# Altium PCB Coin.PcbDoc (part 1 of 2)
Units mm, origin at the board's own origin, x right, y up, seen from the top; angles counter-clockwise.
Board outline 39.43 x 39.88 mm, 4 copper layers (Top Layer, Layer 1, Layer 2, Bottom Layer), stack 1.008 mm thick; 78 components, 48 nets, 291 pads, 74 vias.
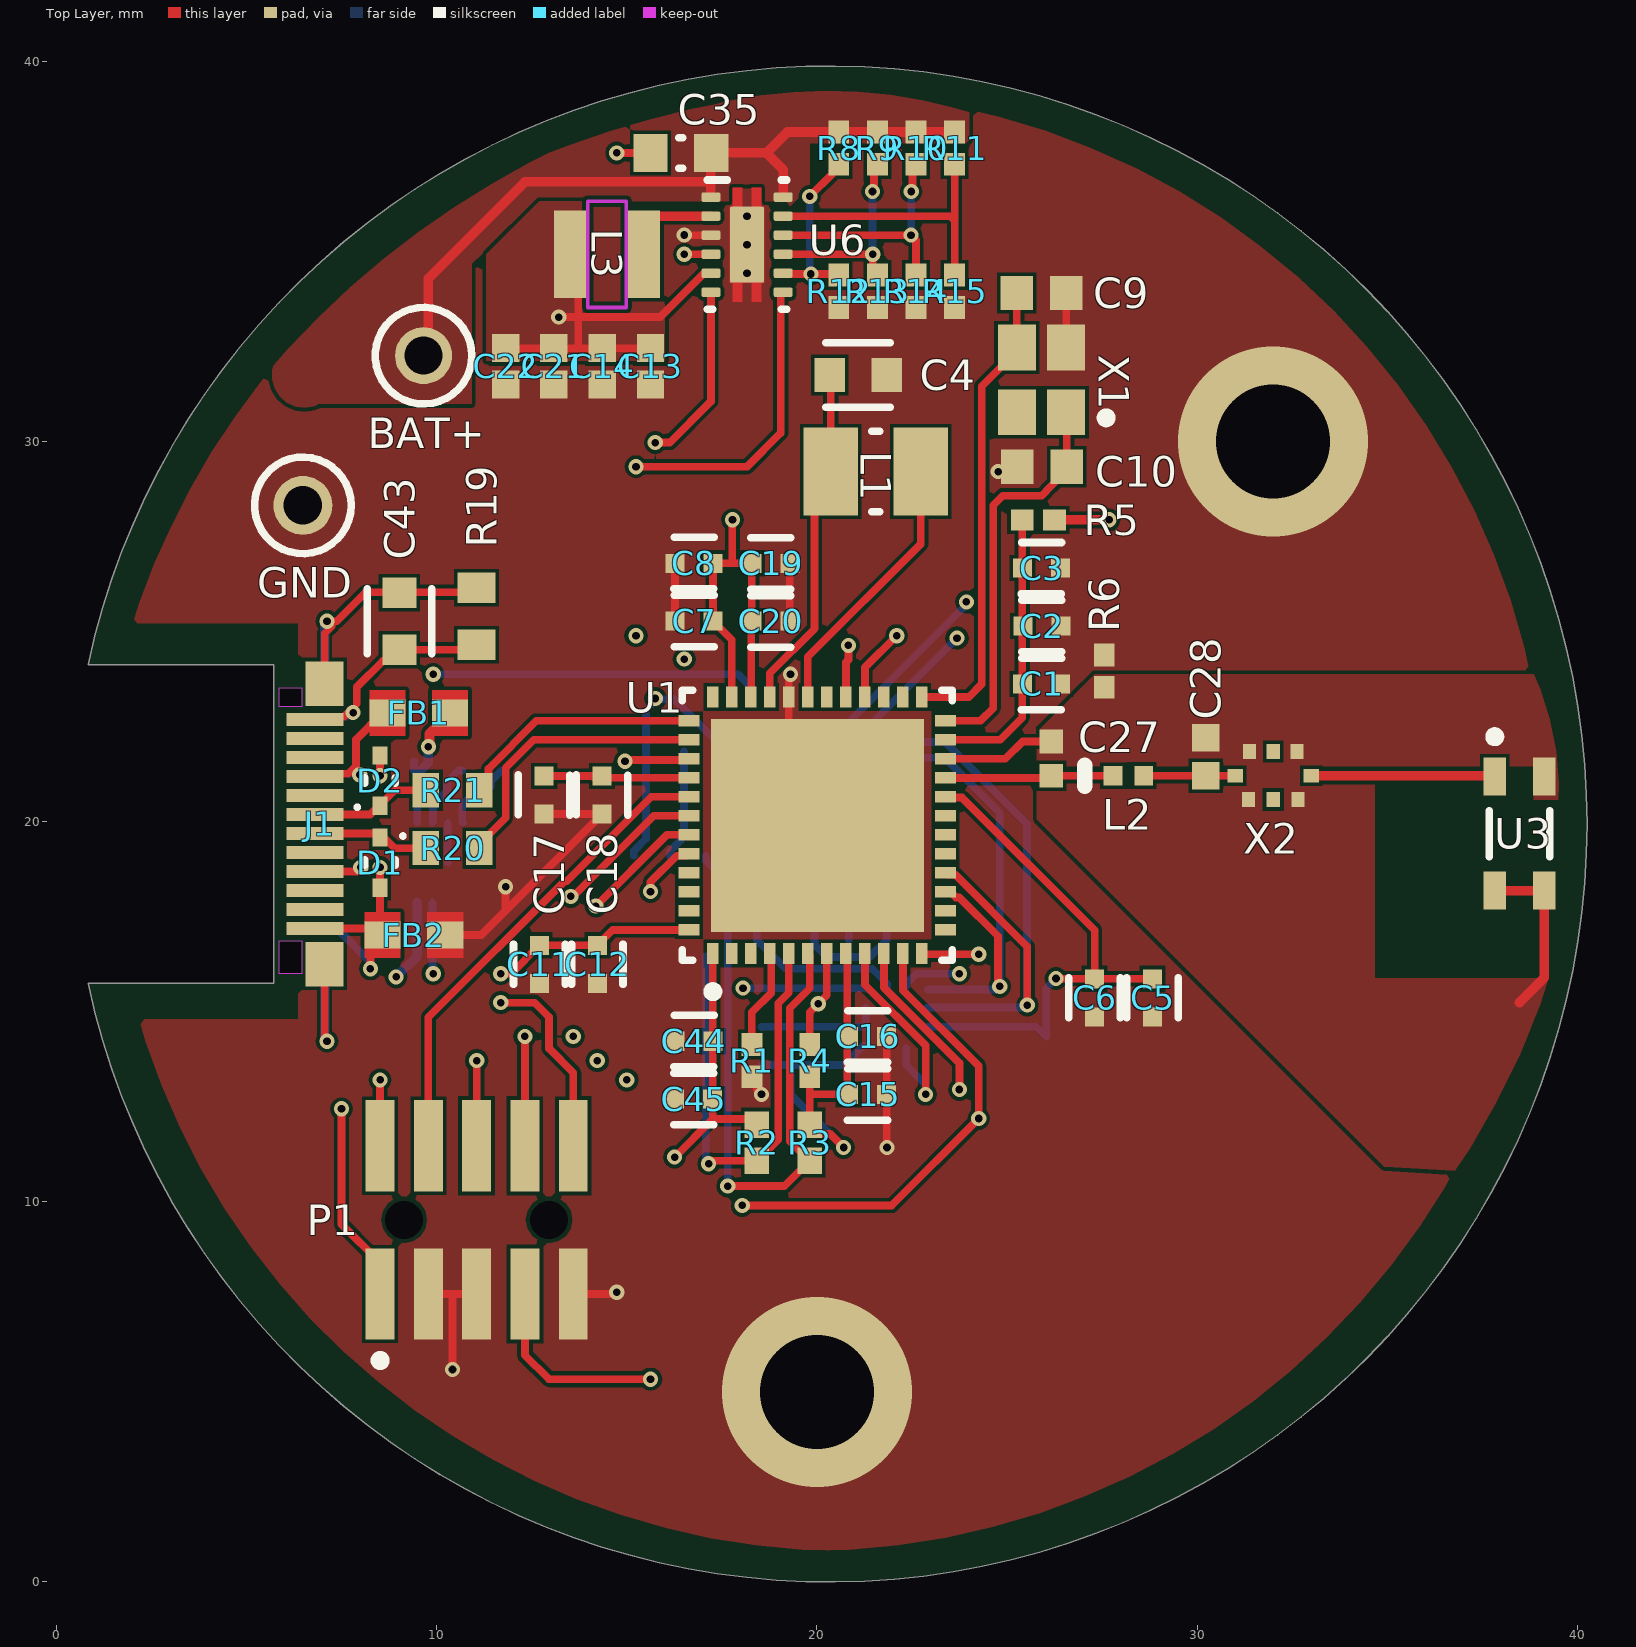
[diagram p0: Top Layer view]
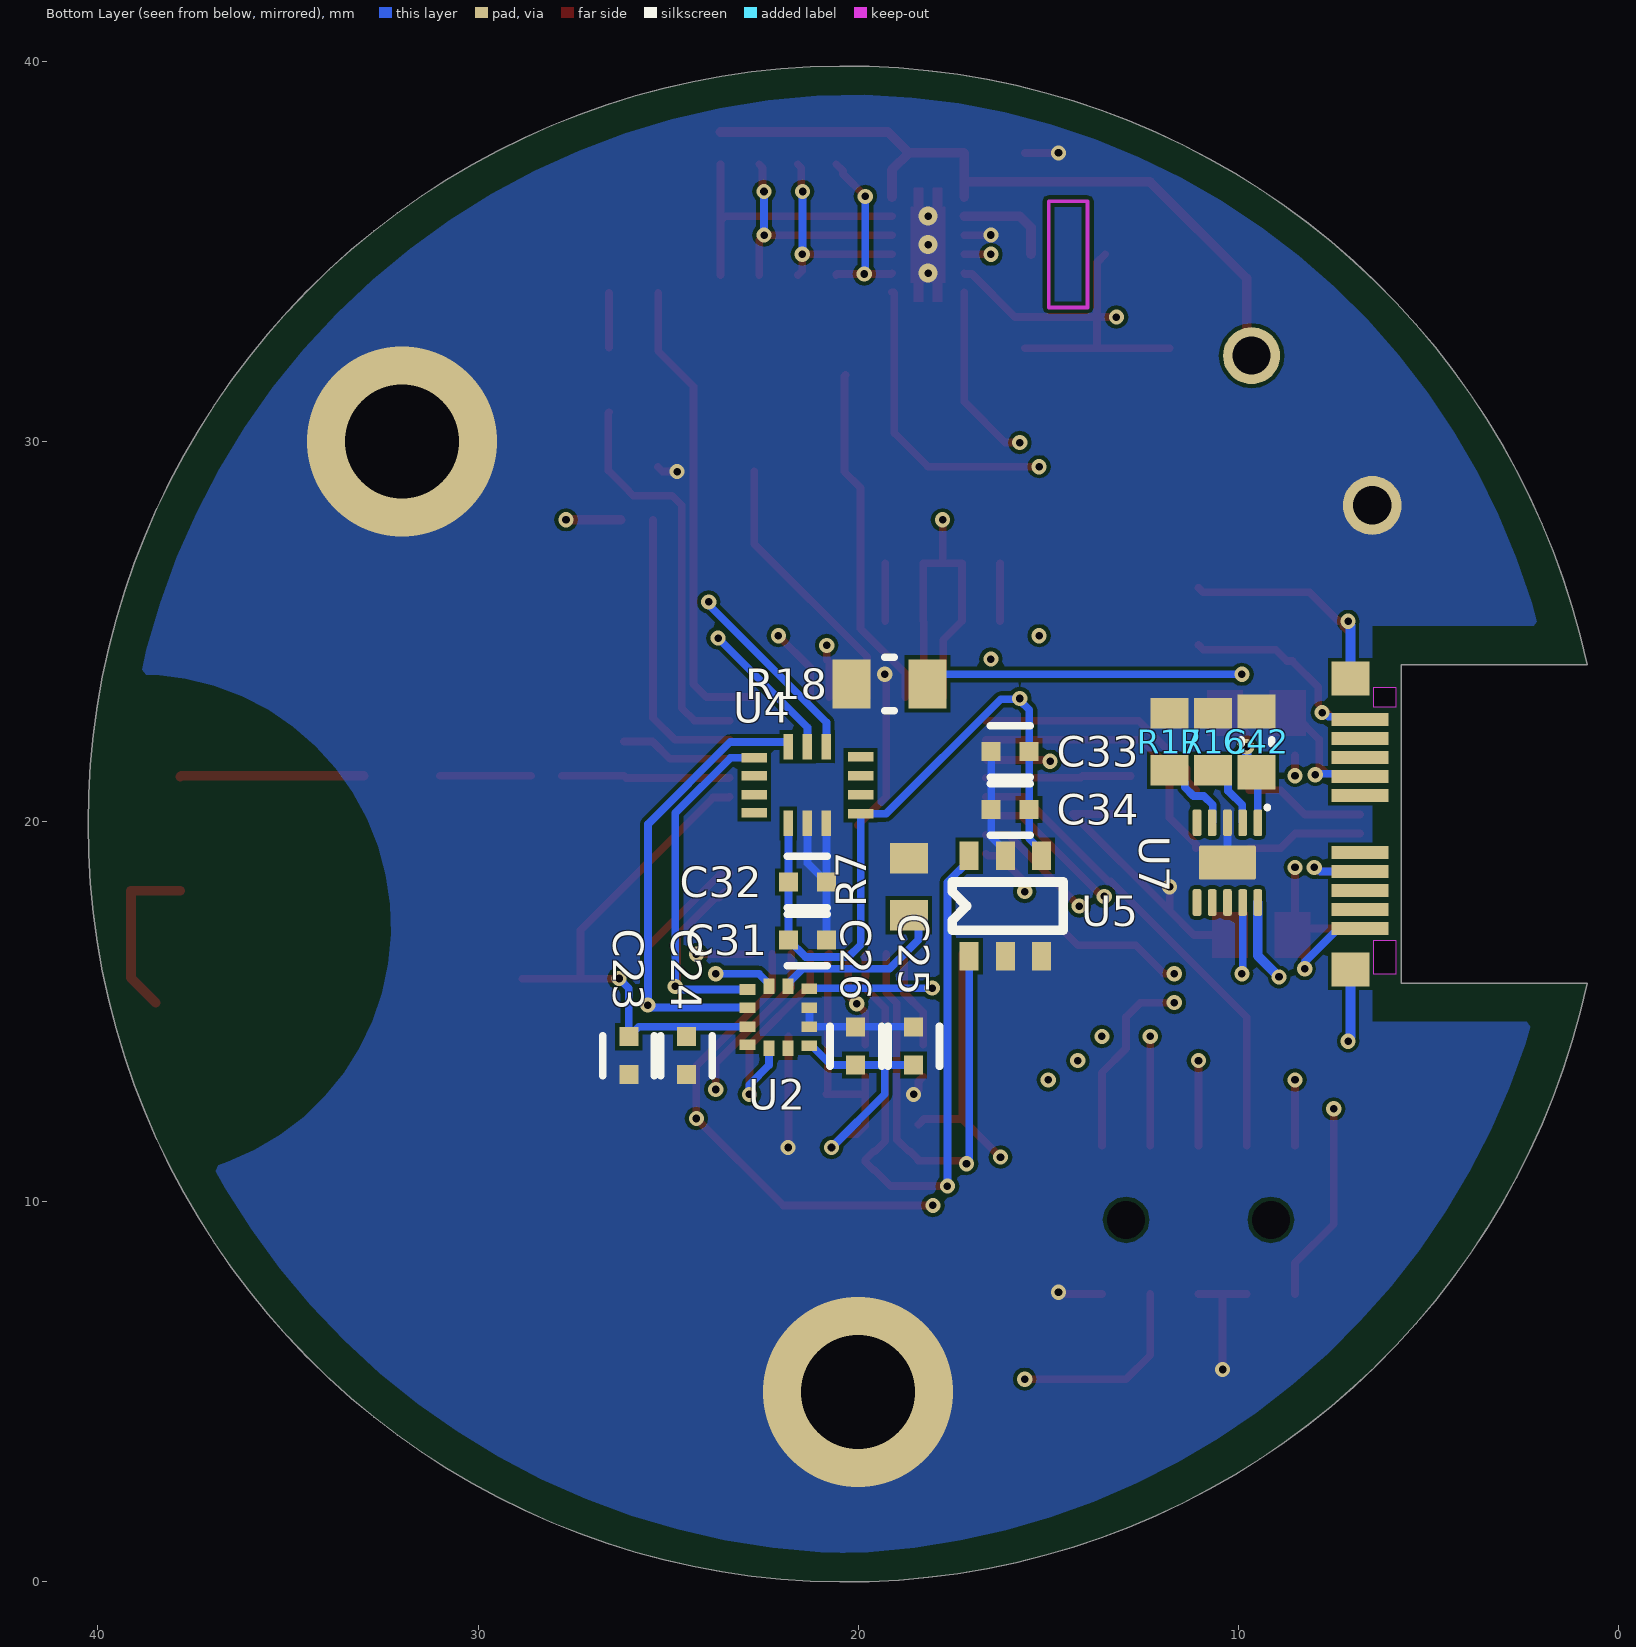
[diagram p1: Bottom Layer view, seen from below]
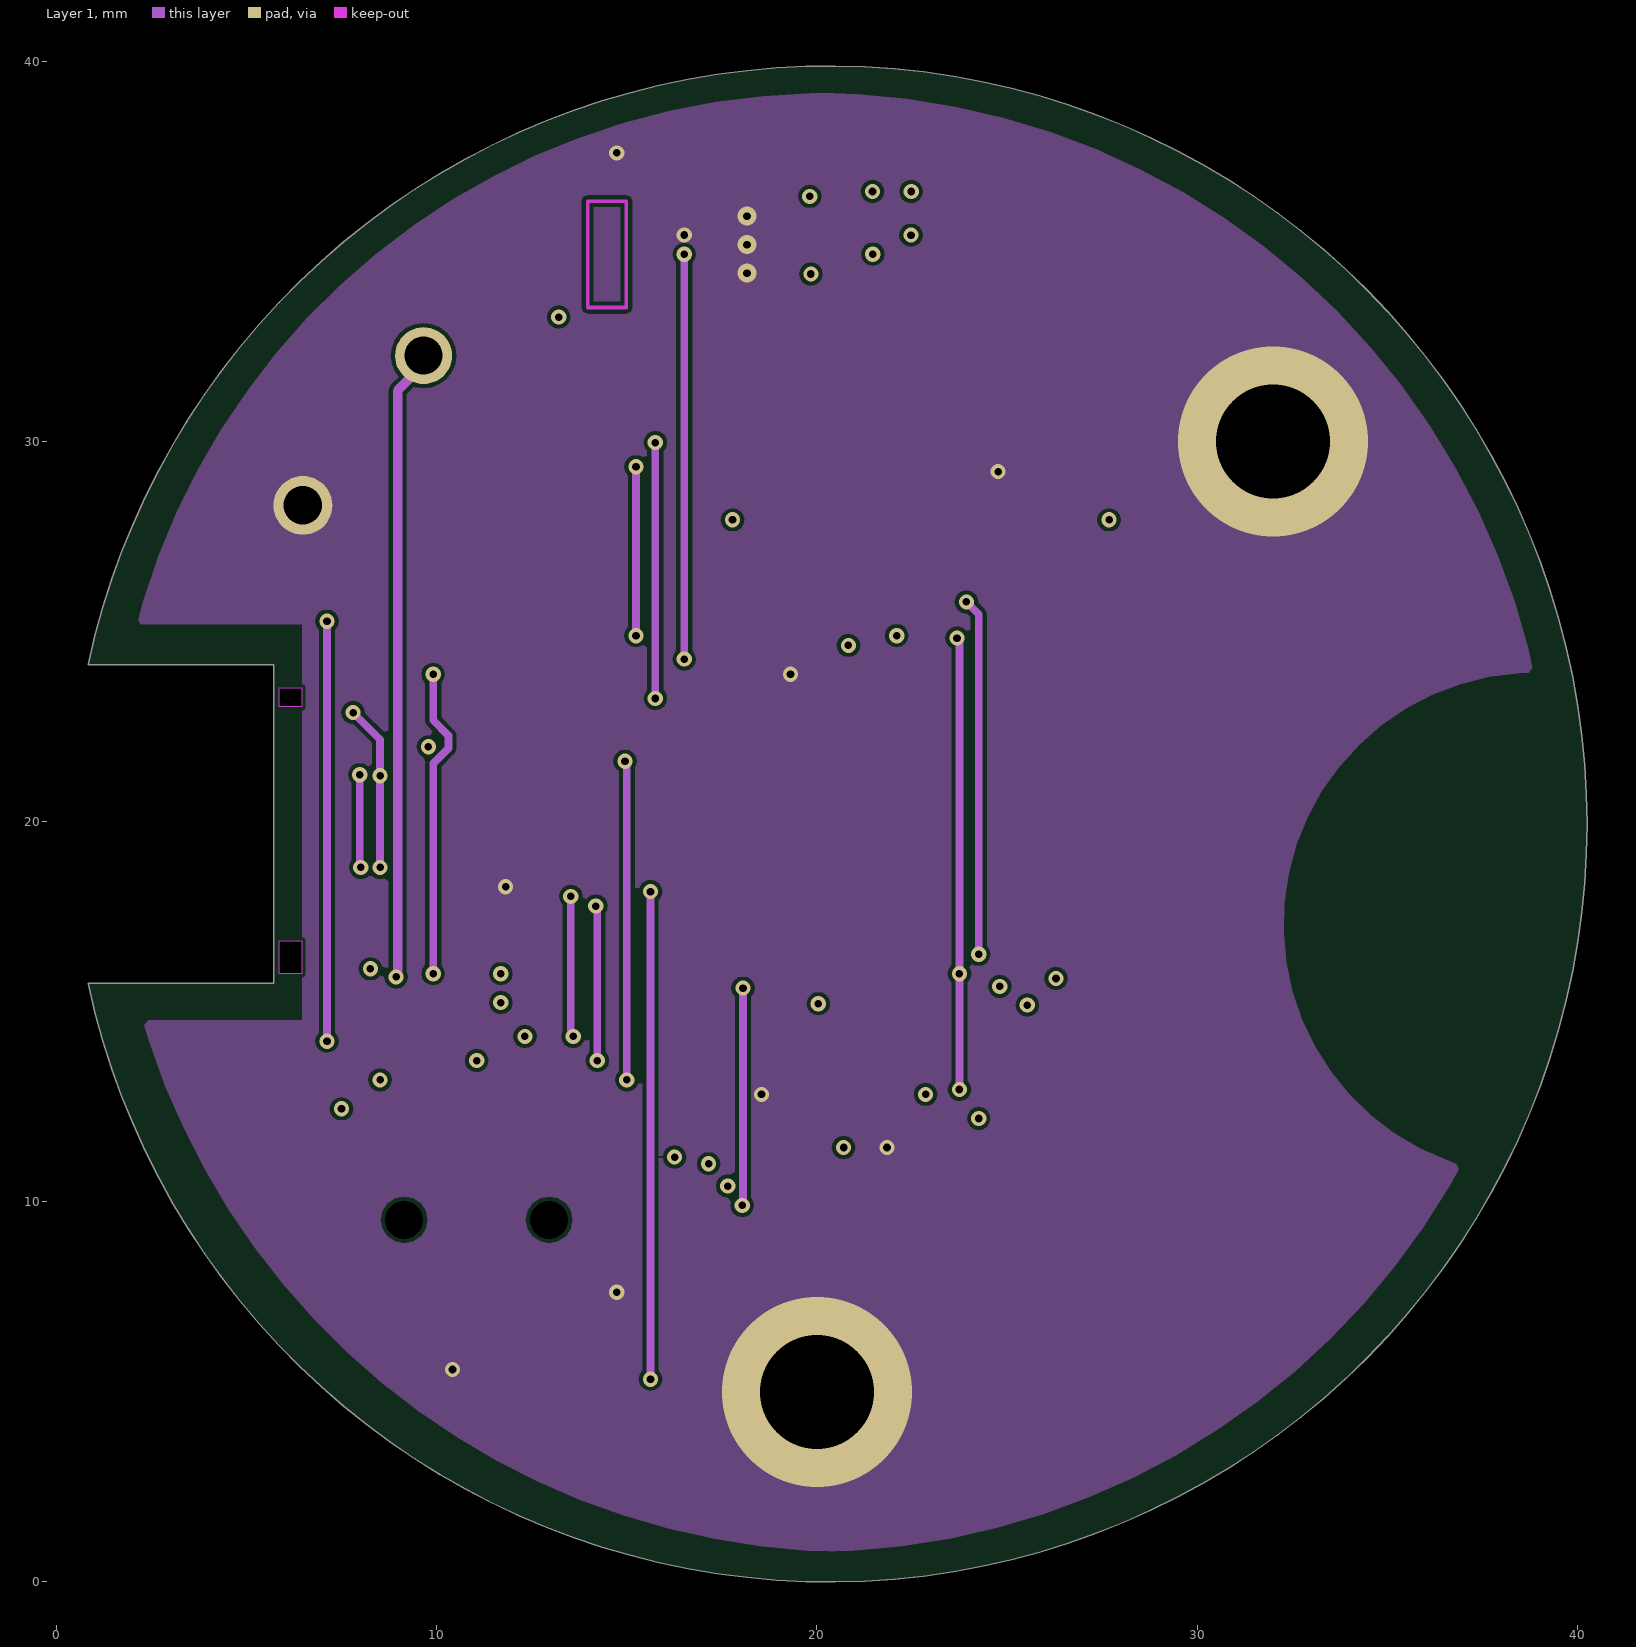
[diagram p2: Layer 1]
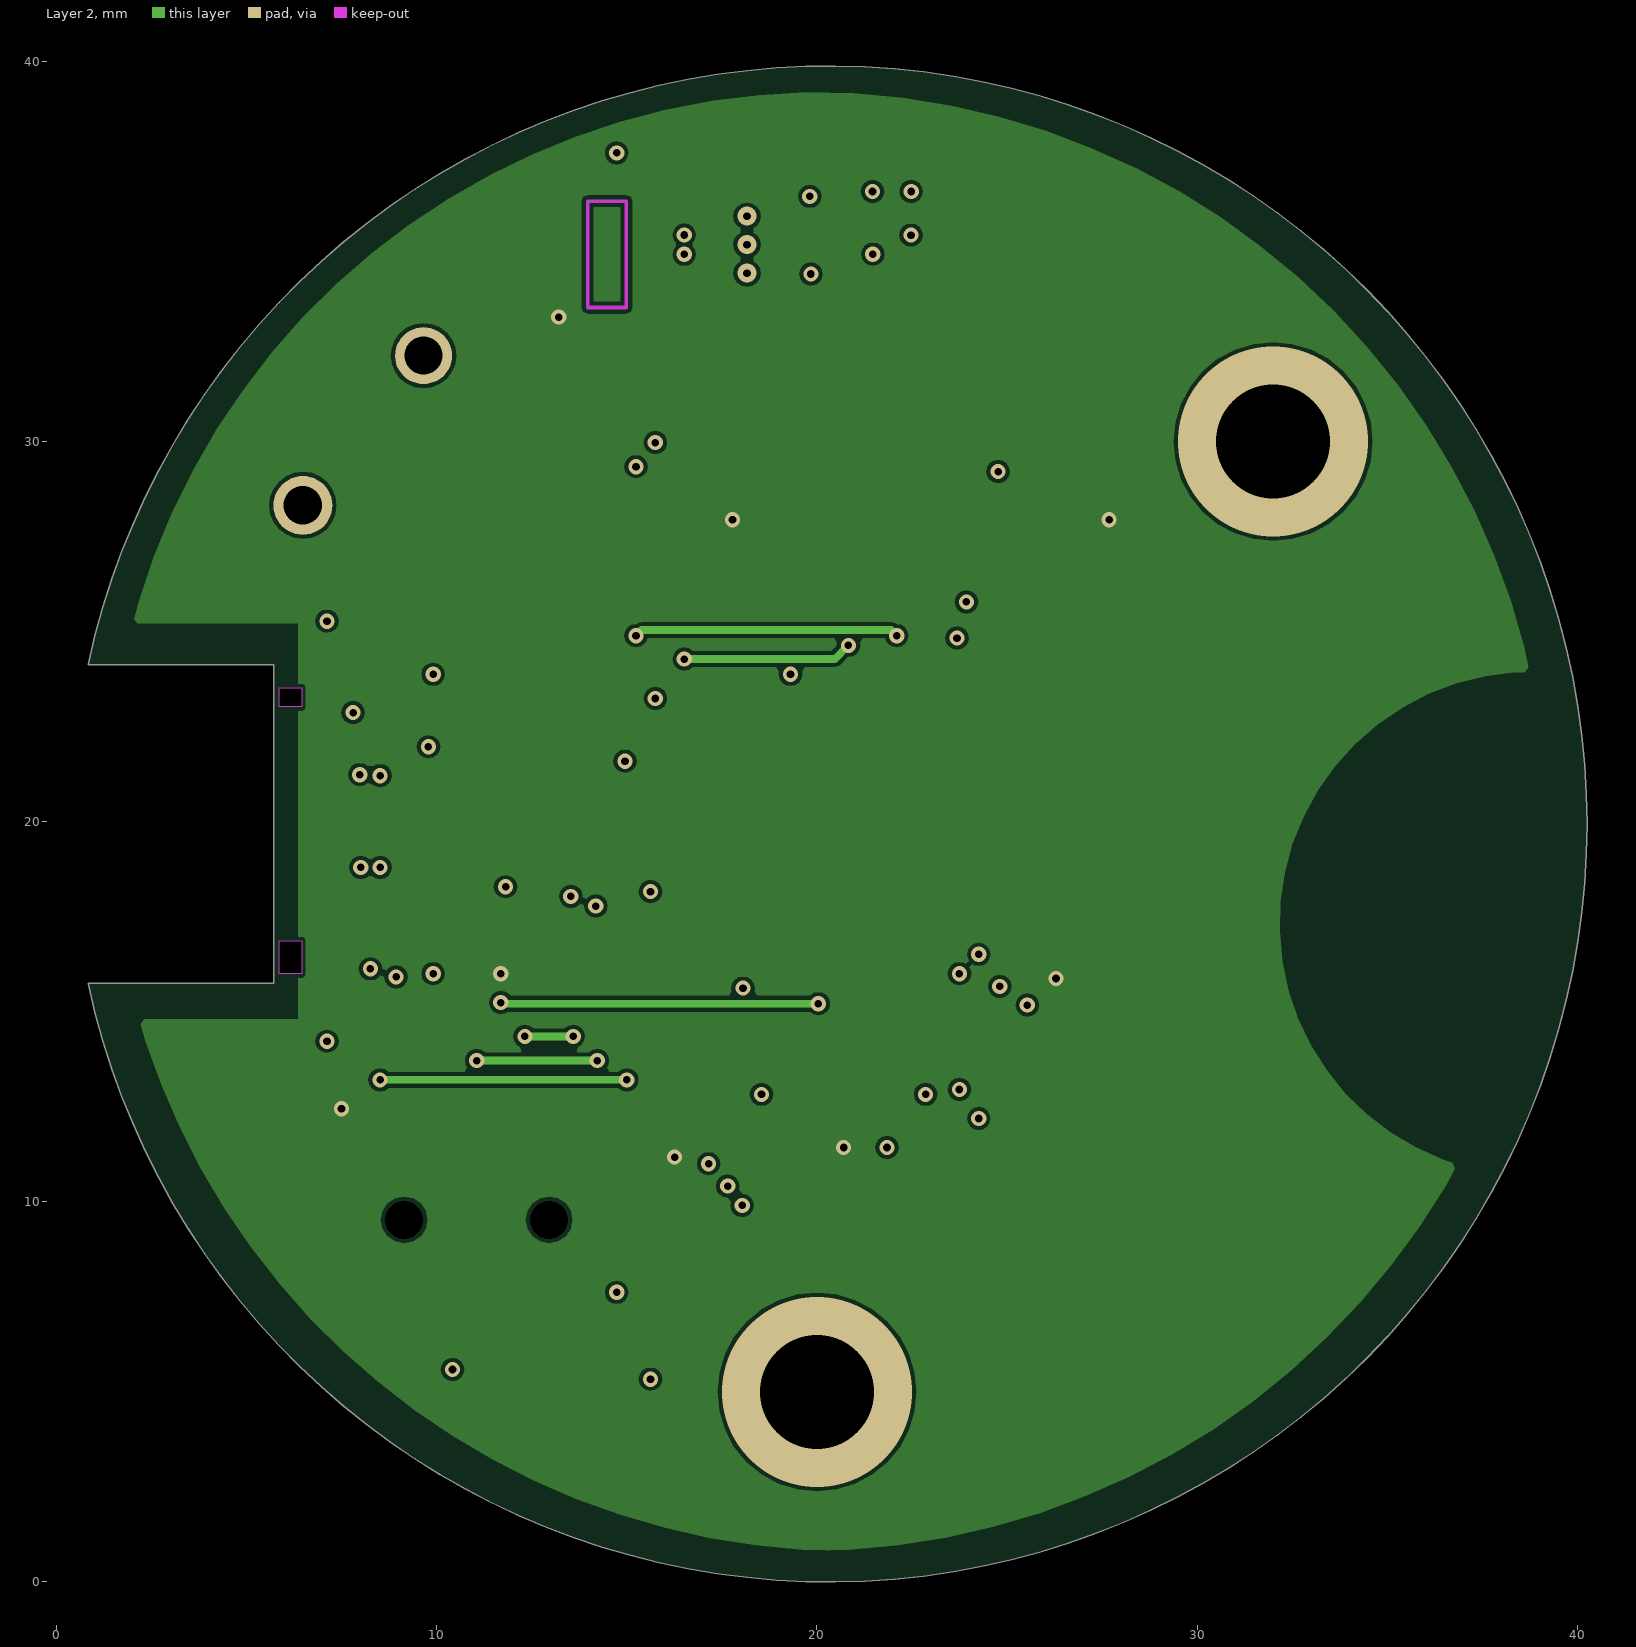
[diagram p3: Layer 2]
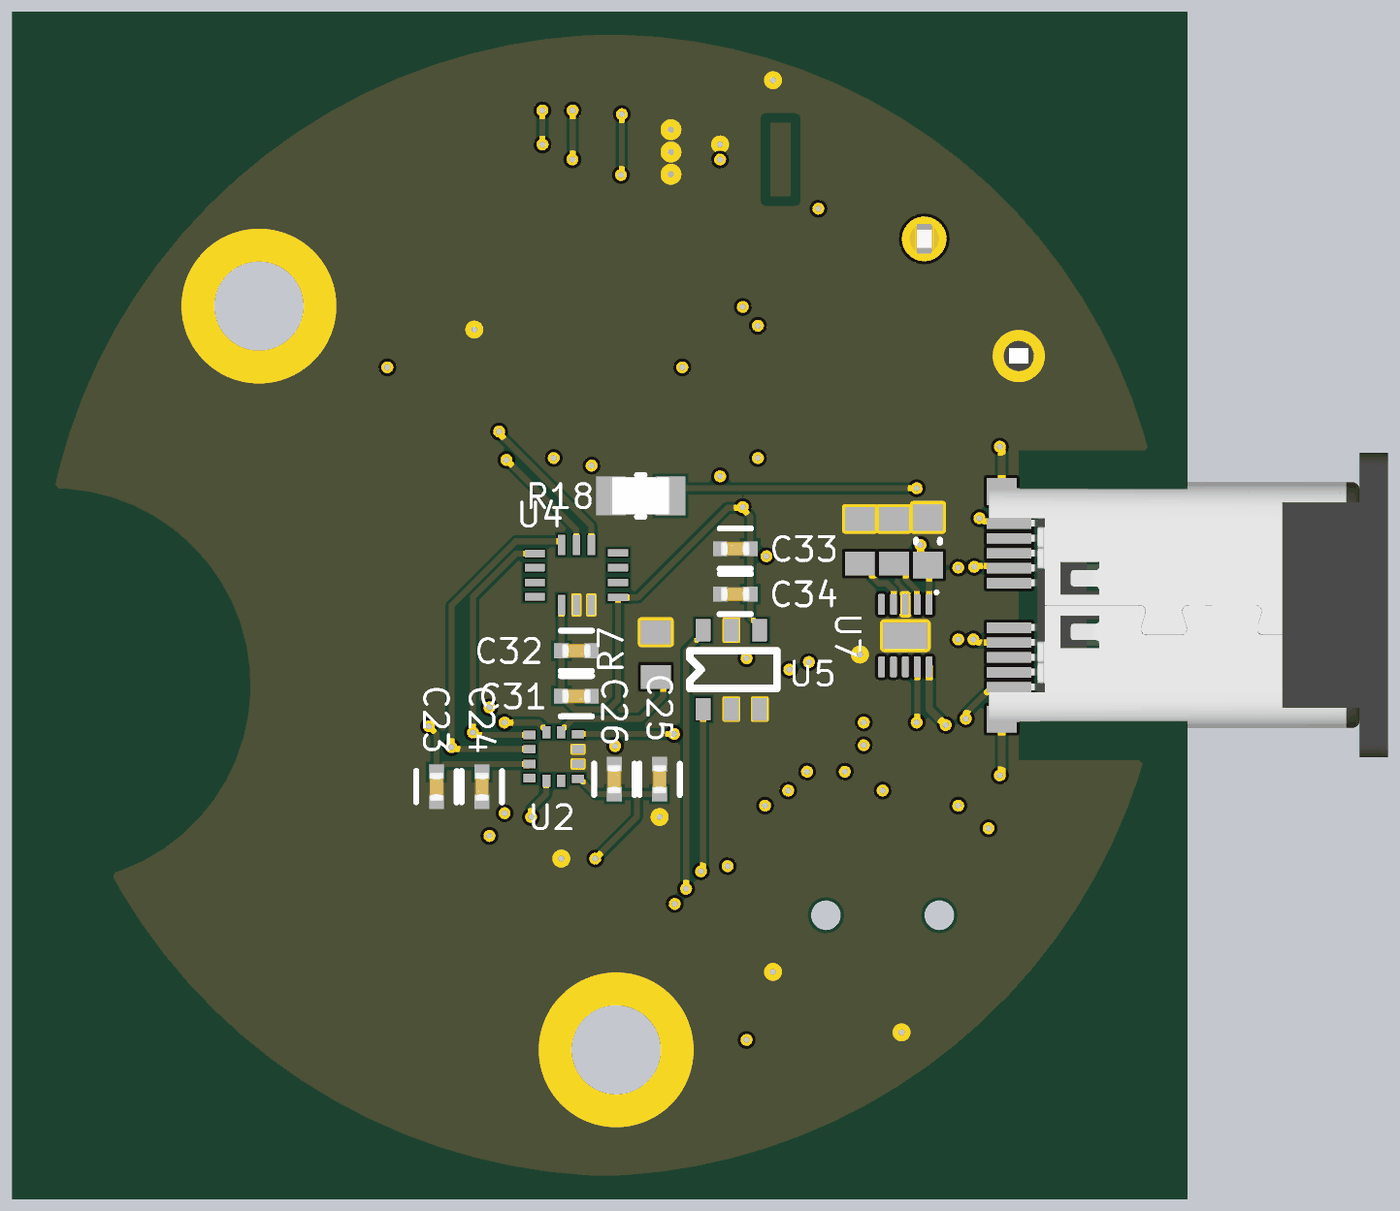
[diagram p4: 3D render of the assembled board from below, using the file's embedded part models]

## Layer stack, top to bottom
Top Solder: solder mask 0.0254, SM-001, Dk 4
Top Layer: signal copper 0.035
Dielectric 1: prepreg 0.1295, PP-017, Dk 4.3
Dielectric 2: prepreg 0.1295, PP-017, Dk 4.3
Layer 1: signal copper 0.035
Dielectric 3: core 0.35, Core-039, Dk 4.8
Layer 2: signal copper 0.035
Dielectric 4: prepreg 0.1295, PP-017, Dk 4.3
Dielectric 5: prepreg 0.1295, PP-017, Dk 4.3
Bottom Layer: signal copper 0.035
Bottom Solder: solder mask 0.0254, SM-001, Dk 4

## Board outline
0.827,15.748 5.715,15.748 5.715,24.13 0.827,24.13 cw(c20.32,19.939) 40.259,19.939 cw(c20.32,19.939)

## Design rules (kind name [scope] priority, off if disabled: settings)
Clearance [All] p1: gap=0.1 ignorepadtopadclearanceinfootprint=FALSE
PolygonConnect [All] p1: connectstyle=Direct reliefconductorwidth=0.254 reliefentries=4 polygonreliefangle="90 Angle" airgapwidth=0.254
RoutingVias [All] p1: holewidth=0.711 width=1.27 viastyle="Through Hole" minholewidth=0.15 minwidth=0.4 maxholewidth=0.15 maxwidth=0.4
SolderMaskExpansion [All] p1: expansion=0.102 istentingtop=FALSE
Width [All] p1: maxlimit=0.254 minlimit=0.1 preferedwidth=0.15
30 further rules are at their usual default settings.

## Classes and differential pairs
component class USB: C43 D1 D2 FB1 FB2 J1 R19 R20 R21
component class RF: C27 C28 L2 U3 X2
component class Power: BAT+ C13 C14 C21 C22 C35 C42 GND L3 R8 R9 R10 R11 R12 R13 R14 R15 R16 R17 R18 U6 U7
component class MCU: C1 C2 C3 C4 C5 C6 C7 C8 C9 C10 C11 C12 C15 C16 C17 C18 C19 C20 C44 C45 L1 P1 R1 R2 R3 R4 R5 R6 U1 X1
component class HALL: C33 C34 U5
component class GYR: C29 C30 C31 C32 U4
component class ACC: C23 C24 C25 C26 R7 U2

## Components (designator, comment, footprint, x,y, rotation, side; value= is the part's Value field where it differs from the comment)
BAT+ "5003" KSTN-5003 9.652,32.258 r270 top
C1 "CC0402KRX7R7BB104" FP-CC0402-MFG 25.908,23.622 r0 top value="100 nF"
C2 "CC0402KRX5R5BB105" FP-CC0402-MFG 25.916,25.146 r0 top value="1 uF"
C3 "CC0402KRX7R9BB101" FP-CC0402-MFG 25.908,26.67 r0 top value="100 pF"
C4 "CC0603KRX5R5BB475" FP-CC0603-DA-MFG 21.082,31.75 r0 top value="4.7 uF"
C5 "CC0402KRX7R7BB104" FP-CC0402-MFG 28.829,15.367 r270 top value="100 nF"
C6 "CC0402KRX5R5BB105" FP-CC0402-MFG 27.305,15.367 r270 top value="1 uF"
C7 "CC0402KRX7R7BB104" FP-CC0402-MFG 16.772,25.273 r180 top value="100 nF"
C8 "CC0402KRX5R5BB105" FP-CC0402-MFG 16.764,26.797 r180 top value="1 uF"
C9 "06031A8R0CAT2A" CAPC1608X90X35LL15T15 25.908,33.909 r180 top
C10 "06031A8R0CAT2A" CAPC1608X90X35LL15T15 25.923,29.337 r180 top
C11 "CC0402KRX7R7BB104" FP-CC0402-MFG 12.7,16.248 r270 top value="100 nF"
C12 "CC0402KRX5R5BB105" FP-CC0402-MFG 14.224,16.248 r270 top value="1 uF"
C13 "GRM155R60J106ME44D" MURA-GRM155R60J106ME44D-2_M 15.621,31.976 r90 top
C14 "GRM155R60J106ME44D" MURA-GRM155R60J106ME44D-2_M 14.351,31.976 r90 top
C15 "CC0402KRX7R7BB104" FP-CC0402-MFG 21.336,12.827 r0 top value="100 nF"
C16 "CC0402KRX5R5BB105" FP-CC0402-MFG 21.336,14.351 r0 top value="1 uF"
C17 "CC0402KRX7R7BB104" FP-CC0402-MFG 12.827,20.701 r270 top value="100 nF"
C18 "CC0402KRX5R5BB105" FP-CC0402-MFG 14.351,20.701 r270 top value="1 uF"
C19 "CC0402KRX7R7BB104" FP-CC0402-MFG 18.788,26.797 r0 top value="100 nF"
C20 "CC0402KRX5R5BB105" FP-CC0402-MFG 18.788,25.273 r0 top value="1 uF"
C21 "GRM155R60J106ME44D" MURA-GRM155R60J106ME44D-2_M 13.081,31.976 r90 top
C22 "GRM155R60J106ME44D" MURA-GRM155R60J106ME44D-2_M 11.811,31.976 r90 top
C23 "CC0402KRX7R7BB104" FP-CC0402-MFG 26.035,13.843 r270 bottom value="100 nF"
C24 "CC0402KRX5R5BB105" FP-CC0402-MFG 24.511,13.843 r270 bottom value="1 uF"
C25 "CC0402KRX7R7BB104" FP-CC0402-MFG 18.542,14.097 r90 bottom value="100 nF"
C26 "CC0402KRX5R5BB105" FP-CC0402-MFG 20.066,14.097 r90 bottom value="1 uF"
C27 "CAP 0.8pF 50V 0402(1005)" CAPC0402(1005)60_N 26.162,21.659 r270 top value=0.8pF
C28 "CAP 0.3pF 50V 0402(1005)" CAPC0402(1005)60_M 30.226,21.709 r270 top value=0.3pF
C31 "CC0402KRX7R7BB104" FP-CC0402-MFG 21.336,16.891 r180 bottom value="100 nF"
C32 "CC0402KRX5R5BB105" FP-CC0402-MFG 21.336,18.415 r180 bottom value="1 uF"
C33 "CC0402KRX7R7BB104" FP-CC0402-MFG 16.002,21.844 r0 bottom value="100 nF"
C34 "CC0402KRX5R5BB105" FP-CC0402-MFG 16.002,20.32 r0 bottom value="1 uF"
C35 "CAP 10uF 6.3V 0603(1608)" CAPC0603(1608)100_N 16.421,37.592 r0 top value=10uF
C42 "CAP 10uF 6.3V 0603(1608)" CAPC0603(1608)100_N 9.525,22.098 r270 bottom value=10uF
C43 "CC0603KRX7R9BB101" FP-CC0603-DA-MFG 9.017,25.273 r270 top value="100 pF"
C44 "CC0402KRX7R7BB104" FP-CC0402-MFG 16.764,14.224 r180 top value="100 nF"
C45 "CC0402KRX5R5BB105" FP-CC0402-MFG 16.756,12.7 r180 top value="1 uF"
D1 "ESD5Z5.0T1G" ONSC-SOD-523-2-502-01_V 8.509,18.923 r270 top
D2 "ESD5Z5.0T1G" ONSC-SOD-523-2-502-01_V 8.509,21.082 r90 top
FB1 "BLM18PG121SN1D" MURA-BLM18PG_KG-B25-CHIP-2_V1 9.525,22.86 r180 top
FB2 "BLM18PG121SN1D" MURA-BLM18PG_KG-B25-CHIP-2_V1 9.398,17.018 r180 top
GND "5001" KSTN-5001 6.477,28.321 r270 top
J1 "632712000011" 632712000011 0,19.939 r270 top
L1 "LQM2HPN2R2MG0L" INDC2520X100X60ML20T20 21.548,29.21 r0 top
L2 "LQG15HS2N7S02D" INDC1005X55X25LL05T10_A 28.194,21.209 r0 top
L3 "74438322022" "SMD 2508" 14.478,34.925 r180 top
P1 "20021121-00010C4LF" HDR2X5_SMT 11.049,9.525 r0 top
R1 "RC0402FR-07100KL" RESC1005X40X25NL05T10 18.288,13.716 r90 top
R2 "RC0402FR-0710KL" RESC1005X40X25ML05T10 18.415,11.557 r270 top
R3 "RC0402FR-0710KL" RESC1005X40X25ML05T10 19.812,11.557 r270 top
R4 "RC0402FR-07100KL" RESC1005X40X25NL05T10 19.812,13.716 r90 top
R5 "RC0402FR-070RL" RESC1005X40X25NL05T10 25.825,27.94 r180 top
R6 "RC0402FR-070RL" RESC1005X40X25NL05T10 27.559,23.959 r90 top
R7 "RC0603FR-0710KL" RESC1608X55X25ML10T15 18.669,18.288 r90 bottom
R8 "RC0402FR-07100KL" RESC1005X40X25NL05T10 20.574,37.719 r90 top
R9 "RC0402FR-07100KL" RESC1005X40X25NL05T10 21.59,37.719 r90 top
R10 "RC0402FR-07100KL" RESC1005X40X25NL05T10 22.606,37.719 r90 top
R11 "RC0402FR-07100KL" RESC1005X40X25NL05T10 23.622,37.719 r90 top
R12 "RC0402FR-07100KL" RESC1005X40X25NL05T10 20.574,33.953 r90 top
R13 "RC0402FR-07100KL" RESC1005X40X25NL05T10 21.59,33.953 r90 top
R14 "RC0402FR-07100KL" RESC1005X40X25NL05T10 22.606,33.953 r90 top
R15 "RC0402FR-07100KL" RESC1005X40X25NL05T10 23.622,33.953 r90 top
R16 "RC0603JR-071KL" RESC1608X55X25ML10T15 10.668,22.098 r270 bottom
R17 "RT0603BRD072KL" RESC1608X55X25ML10T15 11.811,22.098 r270 bottom
R18 "NTCS0805E3103JMT" FP-NTCS0805-MFG 19.177,23.622 r180 bottom value=10kΩ
R19 "RC0603FR-0710KL" RESC1608X55X25ML10T15 11.049,25.4 r270 top
R20 "RC0603FR-0722RL" RESC1608X55X25NL10T15 10.414,19.304 r180 top
R21 "RC0603FR-0722RL" RESC1608X55X25NL10T15 10.414,20.828 r180 top
U1 "STM32WB55CGU6" FP-STM32WB55CGU6-MFG 20.012,19.903 r90 top
U2 "BMA253" LGA12 22.098,14.859 r180 bottom
U3 "2450AT18D0100E" JT-2450AT18D0100E_V 38.481,19.685 r270 top
U4 "Gyroscope" LGA14 21.336,20.955 r180 bottom
U5 "Hall sensor" TSOP6 16.129,17.78 r180 bottom
U6 "TPS62740DSST" DSS0012A_V 18.161,35.179 r0 top
U7 "BQ24040DSQT" DSQ0010A_V 10.287,18.923 r270 bottom
X1 "CX2520DB32000D0GEJZ1" AVX-CX2520DB32000D0GEJZ1-4_V 25.908,31.623 r180 top
X2 "RF filter" LFL21_TC 32.004,21.209 r0 top

## Footprints (in the part's own frame and the unit in brackets; to place one, negate y for a bottom-side part, rotate by r counter-clockwise, add the part's x,y. Pads: shape width x height; smd on the part's side, far side on the other; paste and mask are expansions set on the pad)
632712000011 [mm] "USB 3.1 Type C Plug Horizontal SMT"
  rect 0.35x1.5 smd: A1(2.75,6.8) A2(2.25,6.8) A3(1.75,6.8) A4(1.25,6.8) A5(0.75,6.8) A6(0.25,6.8) A7(-0.25,6.8) A8(-0.75,6.8) A9(-1.25,6.8) A10(-1.75,6.8) A11(-2.25,6.8) A12(-2.75,6.8)
  rect 0.35x1.5 smd far side: B1(-2.75,6.8) B2(-2.25,6.8) B3(-1.75,6.8) B4(-1.25,6.8) B5(-0.75,6.8) B8(0.75,6.8) B9(1.25,6.8) B10(1.75,6.8) B11(2.25,6.8) B12(2.75,6.8)
  rect 0.9x1 smd far side: Shell(-3.825,7.05) Shell(3.825,7.05)
  rect 1.18x1 smd: Shell(-3.69,7.05) Shell(3.69,7.05)
  Keep-Out Layer board cut-out: 3.075,5.85 3.075,6.45 3.945,6.45 3.945,5.85
  Keep-Out Layer board cut-out: -3.58,5.85 -3.58,6.45 -3.08,6.45 -3.08,5.85
  body extent -5.13,-5.92 5.12,7.48, height 1.74
AVX-CX2520DB32000D0GEJZ1-4_V [mm] "Hand Drawn, 4-Leads,Body 2.5x2mm"
  rect 1x1.2 smd: 1(-0.65,0.85) 2(-0.65,-0.85) 3(0.65,-0.85) 4(0.65,0.85)
  silkscreen extent -1.83,0.88 -1.58,1.12, body extent -1,-1.25 1,1.25, height 0.55
CAPC0402(1005)60_M [mm] "Chip Capacitor, Body 1.0x0.5mm, Height 0.6mm, IPC Low Density"
  rect 0.72x0.72 smd: 1(-0.5,0) 2(0.5,0)
  body extent -0.55,-0.3 0.55,0.3, height 0.6
CAPC0402(1005)60_N [mm] "Chip Capacitor, Body 1.0x0.5mm, Height 0.6mm, IPC Medium Density"
  rect 0.62x0.62 smd: 1(-0.45,0) 2(0.45,0)
  body extent -0.55,-0.3 0.55,0.3, height 0.6
CAPC0603(1608)100_N [mm] "Chip Capacitor, Body 1.6x0.8mm, Height 1.0mm, IPC Medium Density"
  rect 0.9x1 smd: 1(-0.8,0) 2(0.8,0)
  silkscreen extent -0.05,-0.4 0.05,0.4, body extent -0.87,-0.48 0.88,0.47, height 1
CAPC1608X90X35LL15T15 [mm] "Chip Capacitor, 2-Leads, Body 1.60x0.81mm, IPC High Density"
  rect 0.85x0.9 smd: 1(-0.65,0) 2(0.65,0)
  body extent -0.88,-0.48 0.87,0.48, height 0.9
DSQ0010A_V [mm] "SON, 10-Leads, Body 2x2mm, Pitch 0.4mm, Thermal Pad 1.5x0.9mm"
  rrect43% 0.7x0.23 smd: 1(-1.05,0.8) 2(-1.05,0.4) 3(-1.05,0) 4(-1.05,-0.4) 5(-1.05,-0.8) 6(1.05,-0.8) 7(1.05,-0.4) 8(1.05,0) 9(1.05,0.4) 10(1.05,0.8)
  rrect11% 0.9x1.5 smd: 11(0,0)
  silkscreen extent -1.5,1 -1.4,1.1, body extent -1,-1 1,1, height 0.8
DSS0012A_V [mm] "SON, 12-Leads, Body 2x3mm, Pitch 0.5mm, Thermal Pad 2x0.9mm, TI Recommended"
  rrect40% 0.5x0.25 smd: 1(-0.95,1.25) 2(-0.95,0.75) 3(-0.95,0.25) 4(-0.95,-0.25) 5(-0.95,-0.75) 6(-0.95,-1.25) 7(0.95,-1.25) 8(0.95,-0.75) 9(0.95,-0.25) 10(0.95,0.25) 11(0.95,0.75) 12(0.95,1.25)
  rrect11% 0.9x2 smd paste-0.45: 13(0,0)
  Top Layer region: -0.375,-1.5 -0.375,-1 -0.45,-1 -0.45,1 -0.375,1 -0.375,1.5 -0.125,1.5 -0.125,1 0.125,1 0.125,1.5 0.375,1.5 0.375,1 0.45,1 0.45,-1 0.375,-1 0.375,-1.5 0.125,-1.5 0.125,-1 -0.125,-1 -0.125,-1.5
  silkscreen extent -1.05,-1.7 1.05,1.7, body extent -1,-1.5 1,1.5, height 0.8
FP-CC0402-MFG [mm]
  rect 0.5x0.5 smd paste+0 mask+0: 1(-0.5,0) 2(0.5,0)
  silkscreen extent -0.53,-0.68 0.53,0.67, body extent -0.87,-0.48 0.87,0.48, height 0.25
FP-CC0603-DA-MFG [mm]
  rect 0.8x0.9 smd paste+0 mask+0: 1(-0.75,0) 2(0.75,0)
  silkscreen extent -0.85,-0.85 0.85,0.85, body extent -0.8,-0.4 0.8,0.4, height 0.9
FP-NTCS0805-MFG [mm]
  rect 1x1.3 smd paste+0 mask+0: 1(-1,0) 2(1,0)
  silkscreen extent -0.13,-0.7 0.13,0.7, body extent -1,-0.63 1,0.62, height 0.95
FP-STM32WB55CGU6-MFG [mm]
  rect 0.55x0.3 smd paste+0 mask+0: 1(-3.375,2.75) 2(-3.375,2.25) 3(-3.375,1.75) 4(-3.375,1.25) 5(-3.375,0.75) 6(-3.375,0.25) 7(-3.375,-0.25) 8(-3.375,-0.75) 9(-3.375,-1.25) 10(-3.375,-1.75) 11(-3.375,-2.25) 12(-3.375,-2.75) 25(3.375,-2.75) 26(3.375,-2.25) 27(3.375,-1.75) 28(3.375,-1.25) 29(3.375,-0.75) 30(3.375,-0.25) 31(3.375,0.25) 32(3.375,0.75) 33(3.375,1.25) 34(3.375,1.75) 35(3.375,2.25) 36(3.375,2.75)
  rect 0.3x0.55 smd paste+0 mask+0: 13(-2.75,-3.375) 14(-2.25,-3.375) 15(-1.75,-3.375) 16(-1.25,-3.375) 17(-0.75,-3.375) 18(-0.25,-3.375) 19(0.25,-3.375) 20(0.75,-3.375) 21(1.25,-3.375) 22(1.75,-3.375) 23(2.25,-3.375) 24(2.75,-3.375) 37(2.75,3.375) 38(2.25,3.375) 39(1.75,3.375) 40(1.25,3.375) 41(0.75,3.375) 42(0.25,3.375) 43(-0.25,3.375) 44(-0.75,3.375) 45(-1.25,3.375) 46(-1.75,3.375) 47(-2.25,3.375) 48(-2.75,3.375)
  rect 5.6x5.6 smd paste+0 mask+0: 49(0,0)
  silkscreen extent -4.5,-3.55 3.55,3.55, body extent -3.5,-3.5 3.5,3.5, height 0.65
HDR2X5_SMT [mm] "Header, 10-Leads, Body 3.43x6.35mm, Pitch 1.27mm"
  rect 0.76x2.4 smd: 1(-2.54,-1.95) 2(-2.54,1.95) 3(-1.27,-1.95) 4(-1.27,1.95) 5(0,-1.95) 6(0,1.95) 7(1.27,-1.95) 8(1.27,1.95) 9(2.54,-1.95) 10(2.54,1.95)
  round 0 hole 1 unplated: MH1(-1.905,0) MH2(1.905,0)
  silkscreen extent -2.66,-3.82 -2.41,-3.58, body extent -3.17,-1.72 3.17,1.72, height 4.55
INDC1005X55X25LL05T10_A [mm] "Chip Inductor, 2-Leads, Body 1.05x0.55mm, IPC High Density"
  rect 0.49x0.52 smd: 1(-0.405,0) 2(0.405,0)
  silkscreen extent -1.15,-0.28 -1.15,0.28, body extent -0.52,-0.28 0.52,0.28, height 0.55
INDC2520X100X60ML20T20 [mm] "Chip Inductor, 2-Leads, Body 2.7x2.2mm, IPC Low Density"
  rect 1.43x2.32 smd: 1(-1.185,0) 2(1.185,0)
  silkscreen extent -0.1,-1.06 0.1,1.06, body extent -1.35,-1.1 1.35,1.1, height 1
JT-2450AT18D0100E_V [mm] "SMD, 4-Leads, Body 3.2x1.6mm"
  rect 1x0.6 smd: 1(-1.5,-0.65) 2(1.5,-0.65) 3(1.5,0.65) 4(-1.5,0.65)
  silkscreen extent -2.67,-0.8 0.6,0.8, body extent -1.6,-0.8 1.6,0.8, height 1.4
KSTN-5001 [mm] "Test Point, Through Hole, Dia 2.54mm"
  round 1.55 hole 1.016: 1(0,0)
  silkscreen extent -1.27,-1.27 1.27,1.27, body extent -1.25,-1.25 1.25,1.25, height 4.62
KSTN-5003 [mm] "Test Point, Through Hole, Dia 2.54mm"
  round 1.5 hole 1: 1(0,0)
  silkscreen extent -1.27,-1.27 1.27,1.27, body extent -1.27,-1.27 1.27,1.27, height 4.57
LFL21_TC [mm] "Filter"
  rect 0.35x0.4 smd mask+0.05: 1(-0.625,0.635) 2(0,0.635) 3(0.625,0.635) 5(0.65,-0.625) 6(0,-0.625) 7(-0.65,-0.625)
  rect 0.4x0.35 smd mask+0.05: 4(1,0) 8(-1,0)
  body extent -1.14,-0.76 1.14,0.76, height 0.95
LGA12 [mm]
  rect 0.41x0.28 smd mask+0.05: 1(-0.815,0.725) 2(-0.815,0.25) 3(-0.815,-0.25) 4(-0.815,-0.725) 7(0.815,-0.75) 8(0.815,-0.25) 9(0.815,0.25) 10(0.815,0.75)
  rect 0.28x0.41 smd mask+0.05: 5(-0.25,-0.815) 6(0.25,-0.815) 11(0.25,0.815) 12(-0.25,0.815)
  body extent -1.02,-1.02 1.02,1.02, height 0.82
LGA14 [mm]
  rect 0.675x0.25 smd mask+0.05: 1(-1.4,0.725) 2(-1.4,0.25) 3(-1.4,-0.25) 4(-1.4,-0.725) 8(1.4,-0.75) 9(1.4,-0.25) 10(1.4,0.25) 11(1.4,0.75)
  rect 0.25x0.675 smd mask+0.05: 5(-0.5,-1) 6(0,-1) 7(0.5,-1) 12(0.5,1.016) 13(0,1.016) 14(-0.5,1.016)
  body extent -1.91,-1.52 1.91,1.52, height 0.9
MURA-BLM18PG_KG-B25-CHIP-2_V1 [mm] "Chip Ferrite Bead, 2-Leads, Body 1.6x0.8mm, Pitch 1.65mm, Flow Soldering, 18um Land Pad Thickness"
  rect 0.95x0.7 smd mask+0: 1(-0.825,0) 2(0.825,0)
  Top Layer region: -1.3,-0.6 -0.35,-0.6 -0.35,0.6 -1.3,0.6
  Top Layer region: 0.35,-0.6 1.3,-0.6 1.3,0.6 0.35,0.6
  body extent -0.87,-0.48 0.88,0.48, height 0.95
MURA-GRM155R60J106ME44D-2_M [mm] "Chip Capacitor, 2-Leads, Body 1.20x0.52mm, IPC Low Density"
  rect 0.74x0.72 smd: 1(-0.48,0) 2(0.48,0)
  body extent -0.6,-0.26 0.6,0.26, height 0.52
ONSC-SOD-523-2-502-01_V [mm] "SOD, 2-Leads, Body 1.2x0.8mm"
  rect 0.48x0.4 smd: 1(-0.66,0) 2(0.66,0)
  silkscreen extent -0.75,-0.4 0.07,0.65, body extent -0.6,-0.4 0.6,0.4, height 0.7
RESC1005X40X25ML05T10 [mm] "Chip Resistor, 2-Leads, Body 1.00x0.50mm, IPC Low Density"
  rect 0.7x0.65 smd: 1(-0.475,0) 2(0.475,0)
  body extent -0.53,-0.27 0.53,0.28, height 0.4
RESC1005X40X25NL05T10 [mm] "Chip Resistor, 2-Leads, Body 1.00x0.50mm, IPC Medium Density"
  rect 0.6x0.55 smd: 1(-0.425,0) 2(0.425,0)
  body extent -0.53,-0.27 0.53,0.28, height 0.4
RESC1608X55X25ML10T15 [mm] "Chip Resistor, 2-Leads, Body 1.60x0.80mm, IPC Low Density"
  rect 0.8x1 smd: 1(-0.75,0) 2(0.75,0)
  body extent -0.85,-0.45 0.85,0.45, height 0.55
RESC1608X55X25NL10T15 [mm] "Chip Resistor, 2-Leads, Body 1.70x0.90mm, IPC Medium Density"
  rect 0.7x0.9 smd: 1(-0.7,0) 2(0.7,0)
  body extent -0.85,-0.45 0.85,0.45, height 0.55
"SMD 2508" [mm] "Chip Inductor, 2-Leads, Body 2.5x2.0mm, IPC Medium Density"
  rect 0.85x2.3 smd: 1(-0.975,0) 2(0.975,0)
  Keep-Out Layer lines w0.1: 0.508,1.397 -0.508,1.397 -0.508,-1.397 0.508,-1.397 0.508,1.397
  body extent -1.25,-1 1.25,1, height 0.8
TSOP6 [mm]
  rect 0.5x0.75 smd mask+0.05: 1(-0.95,-1.325) 2(0,-1.325) 3(0.95,-1.325) 4(0.95,1.325) 5(0,1.325) 6(-0.95,1.325)
  silkscreen extent -1.4,-0.64 1.52,0.64

## Part data
BAT+: library part CMP-1672-00009-1, "Test Point, Orange, 1-Pin THD, RoHS", Forward Current="3 A", Forward Voltage="1.08 V", Max Operating Temperature="150 degC", Max Surge Current="80 A", Min Operating Temperature="-65 degC", Package Quantity=500, Peak Reverse Current="600 uA", ComponentLink1Description="Manufacturer URL", ComponentLink1URL=http://www.keyelco.com/, ComponentLink2Description=Datasheet, ComponentLink2URL=http://keyelco.com/userAssets/file/M65p56.pdf, DatasheetVersion=Jun-15, Diameter="5.3 mm", Height="0.25 inch", Length="9.5 mm", Mount="Through Hole", PackageDescription="1-Pin Through Hole Device, Dia 2.54 mm", PackageReference=5003, Packaging=Bulk, Pins=2, Radiation Hardening=No, REACH SVHC="No SVHC", RoHSCompliant=true, Weight="0.01 lb", Width="0.25 inch"
C1 C5 C7 C11 C15 C17 C19 C23 C25 C31 C33 C44: library part CMP-03422-000048-1, "CAP CER 0.1UF 16V X7R 0402", Capacitance="100 nF", Manufacturer=YAGEO, Package=CC0402, Temperature="-55°C to +125°C", Temperature Characteristic=X7R, Temperature Coefficient=30ppm/°C, Temperature Range High=+125°C, Temperature Range Low=-55°C, Tolerance=0.1, Voltage Rating="16 V", Automotive=No, Automotive Grade=NA, Category=Cap, ComponentLink2Description=Datasheet, ComponentLink2URL=http://www.yageo.com/documents/recent/UPY-GP_NP0_16V-to-50V_16.pdf, Device Class L1="Passive Components", Device Class L2=Capacitors, Device Class L3="Ceramic Capacitors", Digikey Description="CAP CER 0.1UF 16V X7R 0402", Footprint Url=http://www.yageo.com/exep/pages/download/literatures/UPY-C_GEN_24.pdf, Height=0.55mm, Ipc Land Pattern Name=CAPC10050X50, Lead Free=Yes, Manufacturer Part Number=CC0402KRX7R7BB104, Material=Ceramic, Mouser Description="0402 0.1 uF 16 V ±10 % Tolerance X7R SMT Multilayer Ceramic Capacitor", Octopart=https://octopart.com/cc0402krx7r7bb104-yageo-42244624, RoHS=TRUE
C2 C6 C8 C12 C16 C18 C20 C24 C26 C32 C34 C45: library part CMP-03422-000496-1, "CAP CER 1UF 6.3V X5R 0402", Capacitance="1 uF", Manufacturer=YAGEO, Package=CC0402, Temperature="-55°C to +125°C", Temperature Characteristic=X5R, Temperature Coefficient=30ppm/°C, Temperature Range High=+125°C, Temperature Range Low=-55°C, Tolerance=0.1, Voltage Rating="6.3 V", Automotive=No, Automotive Grade=NA, Category=Cap, ComponentLink2Description=Datasheet, ComponentLink2URL=http://www.yageo.com/documents/recent/UPY-GP_NP0_16V-to-50V_16.pdf, Device Class L1="Passive Components", Device Class L2=Capacitors, Device Class L3="Ceramic Capacitors", Digikey Description="CAP CER 1UF 6.3V X5R 0402", Footprint Url=http://www.yageo.com/exep/pages/download/literatures/UPY-C_GEN_24.pdf, Height=0.55mm, Ipc Land Pattern Name=CAPC10050X50, Lead Free=Yes, Manufacturer Part Number=CC0402KRX5R5BB105, Material=Ceramic, Mouser Description="Multilayer Ceramic Capacitors MLCC - SMD/SMT 1uF 6.3V X5R 10%", Octopart=https://octopart.com/cc0402krx5r5bb105-yageo-42244618, RoHS=TRUE
C3: library part CMP-03422-000006-1, "CAP CER 100PF 50V X7R 0402", Capacitance="100 pF", Manufacturer=YAGEO, Package=CC0402, Temperature="-55°C to +125°C", Temperature Characteristic=X7R, Temperature Coefficient=30ppm/°C, Temperature Range High=+125°C, Temperature Range Low=-55°C, Tolerance=0.1, Voltage Rating="50 V", Automotive=No, Automotive Grade=NA, Category=Cap, ComponentLink2Description=Datasheet, ComponentLink2URL=http://www.yageo.com/documents/recent/UPY-GP_NP0_16V-to-50V_16.pdf, Device Class L1="Passive Components", Device Class L2=Capacitors, Device Class L3="Ceramic Capacitors", Digikey Description="CAP CER 100PF 50V X7R 0402", Footprint Url=http://www.yageo.com/exep/pages/download/literatures/UPY-C_GEN_24.pdf, Height=0.55mm, Ipc Land Pattern Name=CAPC10050X50, Lead Free=Yes, Manufacturer Part Number=CC0402KRX7R9BB101, Material=Ceramic, Mouser Description="Multilayer Ceramic Capacitor, Cc Series, 100 Pf, - 10%, X7r, 50 V, 0402 [1005 Metric]", Octopart=https://octopart.com/cc0402krx7r9bb101-yageo-42334067, RoHS=TRUE
C4: library part CMP-03422-000495-1, "CAP CER 4.7UF 6.3V X5R 0603", Capacitance="4.7 uF", Manufacturer=YAGEO, Package=CC0603-DA, Temperature="-55°C to +125°C", Temperature Characteristic=X5R, Temperature Coefficient=15%, Temperature Range High=+125°C, Temperature Range Low=-55°C, Tolerance=0.1, Voltage="6.3 V", Automotive=No, Category=Cap, ComponentLink2Description=Datasheet, ComponentLink2URL=http://www.yageo.com/documents/recent/UPY-GPHC_X7R_6.3V-to-50V_18.pdf, Device Class L1="Passive Components", Device Class L2=Capacitors, Device Class L3="Ceramic Capacitors", Digikey Description="CAP CER 4.7UF 6.3V X5R 0603", Footprint Url=http://www.yageo.com/exep/pages/download/literatures/UPY-C_GEN_24.pdf, Height=0.9mm, Lead Free=Yes, Manufacturer Part Number=CC0603KRX5R5BB475, Material=Ceramic, Mouser Description="Multilayer Ceramic Capacitor, CC Series, 4.7 - F, - 10%, X5R, 6.3 V, 0603 [1608 Metric]", Octopart=https://octopart.com/cc0603krx5r5bb475-yageo-42244632, RoHS=TRUE, Voltage Rating="6.3 V"
C9 C10: library part CMP-2006-04063-1, Manufacturer="AVX Interconnect / Elco", Part Number=06031A8R0CAT2A
C13 C14 C21 C22: library part CMP-2000-05265-1, "Chip Monolithic Ceramic Capacitor, 10 uF, +/- 20%, 6.3 V, -55 to 85 degC, 0402 (1005 Metric), RoHS, Tape and Reel", Capacitance=10uF, Case Code - in=0402, Case Code - mm=1005, Case Height=0.5mm, Case Length=1mm, Dielectric=X5R, Manufacturer=Murata, Maximum Operating Temperature=+85C, Minimum Operating Temperature=-55C, Operating Temperature Range=-55Cto+85C, Package / Case=0402(1005metric), Temperature Coefficient / Code=+/-15%, Tolerance=20%, Voltage Rating=6.3V, Brand=MurataElectronics, Case Width=0.5mm, Datasheet URL=http://download.siliconexpert.com/pdfs/2013/2/7/7/4/54/372/mrt_/manual/grm155r60j106me44d.pdf, Datasheet Version=Feb-13, Dimensions=0.5mmWx1mmLx0.5mmH, Factory Pack Quantity=10000, Manufacturer URL=http://www.murata.com/, Packaging=Reel, Product=GeneralTypeMLCCs, Product Category=MultilayerCeramicCapacitorsMLCC-SMD/SMT, Series=GRM, Termination Style=SMD/SMT, Type=GeneralPurposeMLCC, Voltage Rating DC=6.3V
C27: library part CMP-1034-00043-1, "CAP 0.8pF 50V ±0.1pF 0402 (1005 Metric) Thickness 0.6mm SMD", Case-EIA=0402, Case-Metric=1005, Rated Voltage="50 V", Tolerance=Â±0.1pF, Max Thickness="0.6 mm", Technology=SMT
C28: library part CMP-1034-00007-1, "CAP 0.3pF 50V ±0.05pF 0402 (1005 Metric) Thickness 0.6mm SMD", Case-EIA=0402, Case-Metric=1005, Rated Voltage="50 V", Tolerance=Â±0.05pF, Max Thickness="0.6 mm", Technology=SMT
C35 C42: library part CMP-1035-02797-1, "CAP 10uF 6.3V ±20% 0603 (1608 Metric) Thickness 1mm SMD", Case-EIA=0603, Case-Metric=1608, Rated Voltage="6.3 V", Tolerance=Â±20%, Max Thickness="1 mm", Technology=SMT
C43: library part CMP-03422-000747-1, "CAP CER 100PF 50V X7R 0603", Capacitance="100 pF", Manufacturer=YAGEO, Package=CC0603-DA, Temperature="-55°C to +125°C", Temperature Characteristic=X7R, Temperature Coefficient=15%, Temperature Range High=+125°C, Temperature Range Low=-55°C, Tolerance=0.1, Voltage="50 V", Automotive=No, Category=Cap, ComponentLink2Description=Datasheet, ComponentLink2URL=http://www.yageo.com/documents/recent/UPY-GPHC_X7R_6.3V-to-50V_18.pdf, Device Class L1="Passive Components", Device Class L2=Capacitors, Device Class L3="Ceramic Capacitors", Digikey Description="CAP CER 100PF 50V X7R 0603", Footprint Url=http://www.yageo.com/exep/pages/download/literatures/UPY-C_GEN_24.pdf, Height=0.9mm, Lead Free=Yes, Manufacturer Part Number=CC0603KRX7R9BB101, Material=Ceramic, Mouser Description="Multilayer Ceramic Capacitor, CC Series, 100 pF, - 10%, X7R, 50 V, 0603 [1608 Metric]", Octopart=https://octopart.com/cc0603krx7r9bb101-yageo-42334526, RoHS=TRUE, Voltage Rating="50 V"
D1 D2: library part CMP-1063-00102-1, "Transient Voltage Suppressor, Micro-Packaged Diode for ESD Protection, 2-Pin SOD-523, Pb-Free, Tape and Reel", Manufacturer="On Semiconductor", ComponentLink1Description="Manufacturer URL", ComponentLink1URL=http://www.onsemi.com/, ComponentLink2Description=Datasheet, ComponentLink2URL=http://www.onsemi.cn/pub_link/Collateral/ESD5Z2.5T1-D.PDF, ComponentLink3Description="Package Specification", ComponentLink3URL=http://www.onsemi.com/pub_link/Collateral/502-01.PDF, DatasheetVersion="Rev. 10", Direction=Unidirectional, IR Max (uA)=0.05, Mounting Technology="Surface Mount", Number of Lines=1, PackageDescription="2-Pin SOD, Body 1.2 x 0.8 mm", PackageReference=SOD-523-2-502-01, PackageVersion="Rev. E, 09/2010", Packing="Tape and Reel", PartNumber=ESD5Z5.0T1G, PPK Max (W)=174, RoHS=Pb-Free, V(BR) Min (V)=6.2, VRWM Max (V)=5
FB1 FB2: library part CMP-0686-00557-6, "Chip Ferrite Bead for Power Lines, 120 Ohm, 2000 mA, -55 to 125 degC, 1.6 x 0.8 x 0.95 mm SMD, Tape and Reel", DC Resistance="0.05 Ohm Max.", Manufacturer=Murata, Operating Temperature Range="-55 to 125 degC", Rated Current="2000 mA", ComponentLink1Description="Manufacturer URL", ComponentLink1URL=http://www.murata.com/, ComponentLink2Description=Datasheet, ComponentLink2URL=http://www.murata.com/products/catalog/pdf/c31e.pdf, ComponentLink3Description="Package Specification", ComponentLink3URL=http://www.murata.com/products/catalog/pdf/c31e.pdf, DatasheetVersion=08/2013, Impedance (at 100 MHz)="120 Ohm +/- 25%", Mounting Technology="Surface Mount", PackageDescription="2-Pin Chip, Body 1.6 x 0.8 mm", PackageReference=BLM18_H950-2, Packing="Tape and Reel", PartNumber=BLM18PG121SN1D
GND: library part CMP-2000-05181-1, "Test Point, Black, 1-Pin THD, RoHS, Bulk", Alternate Color="5004K-ND / -TESTPOINTPCMINI.040\"DYELLOW / 5003K-ND / -TESTPOINTPCMINI.040\"DORANGE / 5002K-ND / -TESTPOINTPCMINI.040\"DWHITE / 5000K-ND / -TESTPOINTPCMINI.040\"DRED", Color=Black, Manufacturer=Keystone, Standard Package=100, Catalog Drawings=5000Series, Category=TestandMeasurement, Datasheet URL=https://ciiva.com/datasheet-click-2917627?src=ciiva&sig=bd195616, Datasheet Version="Rev. G, 12/2008", Family=TestPoints, Kits="DKTGRS232C-KIT-ND / -TTLCONVERTER", Manufacturer URL=http://www.keyelco.com/, Material=Base,Nylon46,UL94V-0, Mounting Type="0.040\"(1.02mm)HoleDiameter", Online Catalog=ColorCodedTestPoints, Other Names=5001K, Packaging=Bulk, RoHS Information=RoHSComplianceStatement, Series=THM, Terminal="0.010\"x0.020\"(0.25mmx0.51mm)PhosphorBronzeWire,SilverPlated", Type=PCTestPoint,Miniature
J1: library part CMP-1502-03215-1, "USB 3.1 Type C Plug WR-COM, Horizontal, SMT", Contact Resistance=30mOhm, Manufacturer="Wurth Elektronik", Operating Temperature=-25to105degC, Rated Current=5A, Working Voltage=20VDC, Connector Type=USB3.1TypeC, Datasheet URL=https://katalog.we-online.de/em/datasheet/632712000011.pdf, Gender=Plug, Manufacturer URL=http://www.we-online.de, Mounting Technology=SMT, Orientation=Horizontal, Package Reference=632712000011, Packaging=TapeandReel, Part Number=632712000011, Publisher=WurthElektronik
L1: library part CMP-1662-00028-1, "Chip Inductor, 2.2 uH, +/- 20%, -55 to 125 degC, 1008 (2520 Metric), RoHS, Tape and Reel", Capacitance="220 uF", Case\Package=Radial, Max Operating Temperature="85 degC", Min Operating Temperature="-40 degC", Package Quantity=200, Tolerance=20%, Voltage Rating="50 V", ComponentLink1Description="Manufacturer URL", ComponentLink1URL=http://www.murata.com/, ComponentLink2Description=Datasheet, ComponentLink2URL=http://psearch.en.murata.com/inductor/product/LQM2HPN2R2MG0%23.pdf, DatasheetVersion=Aug-16, Diameter="10 mm", Height="12.5 mm", Lead Pitch="5 mm", Length="12.5 mm", Mount="Through Hole", PackageDescription="2-Pin Surface Mounted Device, Body 2.5 x 2 mm", PackageReference=1008, Packaging=Bulk, Pins=2, Radiation Hardening=No, REACH SVHC="No SVHC", RoHSCompliant=true, Voltage Rating (DC)="50 V"
L2: library part CMP-2000-06580-1, "Chip Inductor, 2.7 nH, +/- 0.3 nH, 300 mA, -55 to 125 degC, 0402 (1005 Metric), RoHS, Tape and Reel", Current Rating=300mA, DC Resistance (DCR)=150mOhmMax, Frequency - Self Resonant=6GHz, Frequency - Test=100MHz, Inductance=2.7nH, Manufacturer=Murata, Operating Temperature=-55°C~125°C, Package / Case=0402(1005Metric), Package Description="2-Pin Surface Mount Device, Body 1 x 0.5 mm", Package Reference=0402, Q @ Freq=8@100MHz, Standard Package=10,000, Tolerance=±0.3nH, Catalog Drawings=LQG15HSSeriesTopLQG15HSSeriesEnd, Category=Inductors,Coils,Chokes, Datasheet URL=http://search.murata.co.jp/Ceramy/image/img/PDF/ENG/L0075S0083LQG15HS.pdf, Datasheet Version=09/2010, Family=FixedInductors, Height - Seated (Max)="0.022\"(0.55mm)", Manufacturer URL=http://www.murata.com/, Material - Core=Air, Mounting Technology=SurfaceMount, Mounting Type=SurfaceMount, Online Catalog=LQG15HxSeries, Other Names=490-2615-2, Packaging=Tape&Reel(TR), Product Training Modules=InductorProducts, Series=LQG15HS, Shielding=Unshielded, Size / Dimension="0.039\"Lx0.020\"W(1.00mmx0.50mm)", Type=Multilayer
L3: library part CMP-1411-00004-1, "Power Multilayer Inductor WE-MAPI, L=2.2µH", Inductance=2.2ÂµH, Manufacturer="Wuerth Elektronik", ComponentLink1Description="Manufacturer URL", ComponentLink1URL=http://www.we-online.com, ComponentLink2Description=Datasheet, ComponentLink2URL=http://katalog.we-online.de/kataloge/eisos/media/pdf/74438322022.pdf, PackageReference="SMD 2508", PartNumber=74438322022
P1: library part CMP-2000-05523-1, "Male Header, Pitch 1.27 mm, 2 x 5 Position, Height 4.55 mm, -40 to 85 degC, RoHS, Tape and Reel", Contact resistance Max=30MOhm, Current Rating=1A, Manufacturer=FCI, Package Description="10-Leads Header, Body 3.43 x 6.35, Pitch 1.27 mm", Package Reference=20021121, Package Version="Rev. J, 03/2013", Voltage Rating=125V, Brand=FCI, Contact Material=CopperAlloy, Contact Plating=Gold, Datasheet URL=https://datasheet.ciiva.com/11749/0900766b8118d62a-11749057.pdf, Datasheet Version=06/2011, Factory Pack Quantity=600, Gender=Male, Manufacturer URL=http://portal.fciconnect.com/, Mating Post Length=3.05mm, Mounting Angle=Vertical, Mounting Style=SMD/SMT, Mounting Technology=SurfaceMount, Number of Positions=10, Number of Positions / Contacts=10, Number of Rows=2, Package URL=https://datasheet.ciiva.com/26853/getdatasheetpartid-177140-26853984.pdf, Packaging=Reel, Pitch=1.27mm, Product Category=Headers&WireHousings, Product Type=Headers, RoHS=Details, Series=Minitek, Stack Height=3mm, Termination Style=SMD, Type=Unshrouded
R1 R4 R8 R9 R10 R11 R12 R13 R14 R15: library part CMP-2002-07343-1, Manufacturer="Yageo / Phycomp", Part Number=RC0402FR-07100KL
R2 R3: library part CMP-2002-07353-1, Manufacturer="Yageo / Phycomp", Part Number=RC0402FR-0710KL
R5 R6: library part CMP-2002-07342-1, Manufacturer=Yageo, Part Number=RC0402FR-070RL
R7 R19: library part CMP-2100-03664-1, "Chip Resistor, 10 KOhm, +/- 1%, 01 W, -55 to 155 degC, 0603 (1608 Metric), RoHS, Tape and Reel", Case Code (Imperial)=0603, Case Code (Metric)=1608, Manufacturer=Yageo, Max Operating Temperature=155degC, Min Operating Temperature=-55degC, Package Description="2-Pin Surface Mount Device, Body 1.6 x 0.8 mm", Power Rating=100mW, Resistance=10KOhm, Temperature Coefficient=100ppm/degreesC, Tolerance=1%, Voltage Rating=75V, Voltage Rating (DC)=50V, Case/Package=0603, Composition=ThickFilm, Datasheet URL=http://www.yageo.com/NewPortal/yageodocoutput?fileName=/pdf/R-Chip/PYu-RC_Group_51_RoHS_L_5.pdf, Datasheet Version="Rev. 5, 10/2016", Depth=0.8mm, Height=0.45mm, Lead Free=LeadFree, Lead Pitch=0.3mm, Length=1.6mm, Manufacturer URL=http://www.yageo.com/, Military Standard=Not, Number of Pins=2, Package Reference=0603, Packaging=TapeandReel, REACH SVHC=NoSVHC, RoHSCompliant=true, Termination=SMD/SMT, Weight=7.1E-05oz, Width=0.8mm
R16: library part CMP-2000-05023-1, "Chip Resistor, 1 KOhm, +/- 5%, 0.063 W, -55 to 155 degC, 0603 (1608 Metric), RoHS, Tape and Reel", Manufacturer=Yageo, Package Description="2-Pin Surface Mount Device, Body 1.6 x 0.8 mm", Package Reference=603, Power Rating=100mW, Resistance=1kohm, Resistance Tolerance=±5%, Resistor Case Style=0603[1608Metric], Resistor Element Type=ThickFilm, Temperature Coefficient=±100ppm/degC, Voltage Rating=50V, Automotive Qualification Standard=-, Datasheet URL=https://datasheet.ciiva.com/2452/pyu-rc0603-51-rohs-l-4-2452848.pdf, Datasheet Version="Rev. 4, 04/2009", Manufacturer URL=http://www.yageo.com/, MSL=MSL1-Unlimited, Packaging=CutTape, Product Range=RCSeries, SVHC=ToBeAdvised
R17: library part CMP-2000-04430-1, Manufacturer=Yageo, Part Number=RT0603BRD072KL
R18: library part CMP-02404-000004-1, "THERMISTOR NTC 10KOHM 3570K 0805", B Tolerance=3%, Manufacturer="Vishay BC Components", Package=NTCS0805, Power Rating=210mW, Resistance=10kΩ, Temperature="-40°C to +150°C", Temperature Range High=+150°C, Temperature Range Low=-40°C, Tolerance=5%, Automotive=Yes, Automotive Grade="Grade 0", B 25 85=3570K, Category=Res, ComponentLink2Description=Datasheet, ComponentLink2URL=http://www.vishay.com/docs/29044/ntcs0805e3t.pdf, Device Class L1="Passive Components", Device Class L2=Resistors, Device Class L3=Thermistors, Digikey Description="THERMISTOR NTC 10KOHM 3570K 0805", Height=0.95mm, Ipc Land Pattern Name=RESC200125X80, Lead Free=Yes, Manufacturer Part Number=NTCS0805E3103JMT, Mouser Description="Thermistors - NTC 10K OHM 5%", Octopart=https://octopart.com/ntcs0805e3103jmt-vishay-39723061, RoHS=TRUE, Series=NTCS0805E
R20 R21: library part CMP-1659-00033-1, "Chip Resistor, 22 Ohm, +/- 1%, 0.1 W, -55 to 155 degC, 0603 (1608 Metric), RoHS, Tape and Reel", Case\Package=SIP, Max Input Voltage="1.4 V", Max Operating Temperature="100 degC", Max Ouput Current="8 A", Min Operating Temperature="-25 degC", Package Quantity=200, ComponentLink1Description="Manufacturer URL", ComponentLink1URL=http://www.yageo.com/, ComponentLink2Description=Datasheet, ComponentLink2URL=http://www.yageo.com/documents/recent/PYu-RC_Group_51_RoHS_L_04.pdf, DatasheetVersion="Rev. 4, 02/2016", Height="19.6 mm", Length="18.5 mm", Mount="Through Hole", Output Current="8 A", PackageDescription="2-Pin Surface Mount Device, Body 1.6 x 0.8 mm", PackageReference=0603, Packaging=Rail/Tube, Pins=4, Radiation Hardening=No, REACH SVHC=Unknown, RoHSCompliant=true
U1: library part CMP-12105-000013-1, "ULTRA-LOW-POWER DUAL CORE ARM CO", Ambient Temperature Range High=+85°C, Ambient Temperature Range Low=-40°C, Frequency=64MHz, Manufacturer=STMicroelectronics, Max Junction Temp=+105°C, Max Supply Voltage=3.6V, Min Supply Voltage=1.71V, Package=UFQFPN48, Temperature="-40°C to +105°C", Automotive=No, Category=IC, ComponentLink2Description=Datasheet, ComponentLink2URL=https://www.st.com/resource/en/datasheet/stm32wb55cg.pdf, Core Architecture="ARM Cortex-M4", Data Bus Width=32bits, Device Class L1="Integrated Circuits (ICs)", Device Class L2="Embedded Processors and Controllers", Device Class L3=Microcontrollers, Digikey Description="ULTRA-LOW-POWER DUAL CORE ARM CO", Height=0.65mm, Interface=I2C,SPI,UART,USART,2-Wire,USB,IrDA,Other, Lead Free=Yes, Manufacturer Part Number=STM32WB55CGU6, Memory Size=1MBytes, Memory Type=FLASH, Number Of A/D Converters=1, Number Of Adc Channels=13, Number Of Cores=1, Number Of I2C Channels=2, Number Of I/Os=30, Number Of Pwm Channels=14, Number Of Spi Channels=1, Number Of Timers/Counters=6, Number Of Uart Channels=2, Number Of Usb Channels=1, Octopart=https://octopart.com/stm32wb55cgu6-stmicroelectronics-98750847, Ram Size=256KBytes, RoHS=TRUE, Standoff Height=0mm, Temperature Range High=+105°C, Temperature Range Low=-40°C
U2: Supplier Part Number 1=262-BMA253, Supplier 1=Mouser
U3: library part CMP-2000-05543-1, "Chip RF Antenna, 2.4 to 2.5 GHz, -40 to 125 degC, 4-Pin SMD, RoHS, Tape and Reel", Frequency (Center/Band)=2.4GHz, Frequency Group=UHF(2GHz~3GHz), Frequency Range=2.4GHz~2.5GHz, Manufacturer="Johanson Technology", Package Description="4-Pin Surface Mount Device, Body 3.2 x 1.6 mm", Power - Max=2W, Standard Package=3,000, Antenna Type=Chip, Applications=-, Category=RF/IFandRFID, Datasheet URL=http://www.johansontechnology.com/datasheets/antennas/2450AT18D0100.pdf, Datasheet Version="Rev. 3.0, 09/2015", Family=RFAntennas, Features=-, Gain=1.5dBi, Height (Max)="0.047\"(1.20mm)", Ingress Protection=-, Manufacturer URL=https://www.johansontechnology.com/, Mounting Technology=SurfaceMount, Mounting Type=SurfaceMount, Number of Bands=1, Online Catalog=JohansonTechnologyInc-Embedded, Other Names=712-1573-2, Package Reference=2450AT18D0100E, Packaging=Tape&Reel(TR), Return Loss=-10dB, Series=-, Termination=Solder, VSWR=-
U4: library part BMG250, Supplier Part Number 1=262-BMG250, Supplier 1=Mouser
U5: library part TLI493DA2B6HTSA1, Supplier Part Number 1=726-TLI493DA2B6HTSA1, Supplier 1=Mouser
U6: library part CMP-0323-00573-2, "Step Down Converter For Low Power Applications, 2.2 to 5.5 V VIN, -40 to 85 degC, 12-Pin WSON (DSS), RoHS, Tape and Reel", PartNumber=TPS62740, Temperature Max="85 degC", Temperature Min="-40 degC", ComponentLink1Description="Manufacturer URL", ComponentLink1URL=http://www.ti.com/, ComponentLink2Description=Datasheet, ComponentLink2URL=http://www.ti.com/lit/ds/symlink/tps62740.pdf, ComponentLink3Description="Package Specification", ComponentLink3URL=http://www.ti.com/litv/pdf/mpds336b, DatasheetVersion=SLVSB02B, Mounting Technology="Surface Mount", PackageDescription="12-Pin Plastic Small Outline, Body 3 x 2 mm, Pitch 0.5 mm", PackageReference=DSS0012A, PackageVersion="4209244/C, 07/2011", Packing="Tape and Reel", RoHS=TRUE, VIN Max="5.5 V", VIN Min="2.2 V", VOUT Max="3.3 V", VOUT Min="1.8 V"
U7: library part CMP-0321-00457-2, "800 mA, Single-Input, Single Cell Li-Ion Battery Charger with Auto Start. Vovp=6.6 V, 3.5 V, -40 to 85 degC, 10-pin SON (DSQ), Green (RoHS & no Sb/Br)", Manufacturer="Texas Instruments", Over Voltage Protection=N, ComponentLink1Description=Datasheet, ComponentLink1URL=http://www.ti.com/general/docs/lit/getliterature.tsp?genericPartNumber=BQ24040&fileType=pdf, DatasheetVersion=SLUS941A, Eco-Plan="Green (RoHS & no Sb/Br)", Lead Acid=N, Li-Ion=N, Li-Polymer=N, Mounting Technology="Surface Mount", NiCd=N, NiMH=N, PackageDescription="10-Pin Plastic Small Outline No-Lead, 2 x 2 x 0.8 mm Body, 0.4 mm Pitch, Exposed Pad", PackageReference=DSQ0010A, PackageVersion="revB, Apr-2010", PartNumber=BQ24040DSQT, SubFamily="Battery Charge Management", Vin(Min)(V)=3.5
X1: library part CMP-0449-00001-2, "Crystal, 32 MHz, 8 pF, -10 to 70 degC, Surface Mount 2.5 x 2.0 mm", Frequency Range="32000 kHz", Load Capacitance="8 pF", Manufacturer=Kyocera, Motional Series Resistance="50 ohm (max)", Operating Temperature="-10 to 70 degC", ComponentLink1Description="Manufacturer URL", ComponentLink1URL=http://global.kyocera.com/, ComponentLink2Description=Datasheet, ComponentLink2URL=http://global.kyocera.com/prdct/electro/pdf/xtal/cx2520db_cs_e.pdf, ComponentLink3Description="Package Specification", ComponentLink3URL=http://global.kyocera.com/prdct/electro/pdf/xtal/cx2520db_cs_e.pdf, Drive Level="10uW (100uW max.)", Mounting Technology="Surface Mount", PackageDescription="4-Pin Hand Drawnï¼ŒBody 2.5x2mm", PackageReference=CX2520DB32000D0GEJZ1-4, Packing="Tape and Reel", PartNumber=CX2520DB32000D0GEJZ1
X2: library part LFL212G45TC1A007, Supplier Part Number 1=81-LFL212G45TC1A007, Supplier 1=Mouser

## Via types
v1: diameter 0.4, hole 0.2, Top Layer to Bottom Layer, 69 vias
v2: diameter 0.5, hole 0.2, Top Layer to Bottom Layer, 3 vias
v3: diameter 5, hole 3, Top Layer to Bottom Layer, 2 vias

## Nets (pads, with @x,y where several pads share a name; then routed paths per layer and width w, separated by ;. In a path a pad name is that pad's centre, name@x,y a point inside that pad or via, vN(x,y) a via of type N, cw(c..) or ccw(c..) an arc to the next point about the centre after c; other vN are vias at no path point)
+3.3_MCU: C5.1 C6.1 C7.1 C8.1 C11.1 C12.1 C13.2 C14.2 C15.1 C16.1 C19.1 C20.1 C21.2 C22.2 C23.1 C24.1 C25.1 C26.1 C44.1 C45.1 L3.2 P1.1 R2.1 R3.1 R4.1 R5.1 U1.1 U1.8 U1.20 U1.34 U1.35 U1.48 U2.3 U2.7 U6.5 | length 66.3
  Top Layer w0.203: v1(7.493,12.446) 7.493,9.411 8.509,8.395 P1.1 ; v1(11.684,16.002) 11.954,16.002 C11.1 C12.1 14.629,17.153 U1.48 ; C22.2 C21.2 13.716,32.456 ; v1(13.208,33.274) 13.718,33.274 ; L3.2 13.718,34.71 13.718,33.274 ; 13.718,33.276 15.877,33.276 17.007,34.406 17.188,34.406 U6.5 ; C13.2 C14.2 13.716,32.456 ; v1(16.256,11.176) 17.259,12.179 ; U1.1 17.259,16.525 17.259,12.179 ; U1.35 17.762,24.783 C7.1 17.268,25.277 17.268,26.793 C8.1 17.776,26.797 ; v1(17.78,27.94) 17.776,27.936 17.776,26.797 ; U1.34 18.275,23.291 18.275,25.26 C20.1 C19.1 17.776,26.797 ; R2.1 18.268,12.179 17.259,12.179 ; R4.1 19.812,12.827 ; v1(20.701,11.43) 20.347,11.784 20.035,11.784 19.812,12.007 R3.1 19.812,12.827 ; U1.8 20.799,16.491 20.799,12.864 C15.1 19.812,12.827 ; U1.20 23.407,20.633 23.817,20.633 27.305,17.145 C6.1 ; v1(26.289,15.875) 26.293,15.871 27.301,15.871 C6.1 ; C5.1 C6.1 ; 13.716,32.456 13.718,32.458 13.718,33.274
  Top Layer w0.254: R5.1 v1(27.686,27.94)
  Bottom Layer w0.203: C25.1 19.304,13.597 ; v1(20.701,11.43) 19.304,12.827 19.304,13.597 ; U2.7 21.218,14.109 20.706,13.597 C26.1 19.304,13.597 ; U2.3 25.769,14.609 C23.1 26.035,15.621 v1(26.289,15.875)
+3.3_RF: C1.1 C2.1 C3.1 R5.2 U1.23 | length 7.5
  Top Layer w0.203: U1.23 24.82,22.153 25.4,22.733 R5.2
+3.3_S: C31.1 C32.1 C33.1 C34.1 U4.5 U4.8 U5.4 U6.6 | length 30.1
  Top Layer w0.203: v1(15.748,29.972) 16.129,29.972 17.211,31.054 U6.6
  Layer 1 w0.203: v1(15.748,23.241) v1(15.748,29.972)
  Bottom Layer w0.203: U5.4 15.179,19.23 15.502,19.553 C34.1 C33.1 15.502,22.942 15.748,23.188 v1(15.748,23.241) 15.768,23.221 16.253,23.221 19.269,20.205 U4.8 19.936,16.767 20.264,16.439 21.384,16.439 C31.1 C32.1 U4.5
+3.3_USB: C17.1 C18.1 U1.40 | length 3.8
  Top Layer w0.203: C17.1 14.097,21.201 14.145,21.153 U1.40
+BAT: BAT+.1 C35.2 R8.2 R9.2 R10.2 R11.2 U6.1 U6.12 U7.10 | length 38.5
  Top Layer w0.254: BAT+.1 9.779,32.385 9.779,34.29 12.319,36.83 17.211,36.83 ; U6.1 17.211,36.83 ; U6.12 19.111,37.15 18.669,37.592 ; R11.2 R10.2 R9.2 R8.2 19.221,38.144 18.669,37.592 ; 17.211,36.83 17.211,37.582 C35.2 18.669,37.592
  Layer 1 w0.254: v1(8.931,15.916) 8.971,15.956 8.971,31.34 9.652,32.021 BAT+.1
  Bottom Layer w0.254: v1(8.931,15.916) 9.487,16.472 U7.10
+USB: C42.2 FB1.1 U7.1 | length 3.6
  Top Layer w0.254: v1(9.779,21.971) 9.807,21.999 9.807,22.317 10.002,22.512 10.002,22.637 10.225,22.86 FB1.1
  Bottom Layer w0.203: C42.2@9.398,21.59 9.398,21.349 9.487,21.26 U7.1
  Bottom Layer w0.254: C42.2 9.779,21.552 v1(9.779,21.971)
ACCEL_CS: U1.11 U2.10 | length 21.3
  Top Layer w0.203: v1(18.034,9.906) 21.971,9.906 v1(24.257,12.192) 24.257,13.573 22.262,15.568 U1.11
  Layer 1 w0.203: v1(18.034,9.906) 18.055,9.927 v1(18.055,15.621)
  Bottom Layer w0.203: v1(18.055,15.621) 18.061,15.615 21.277,15.615 U2.10
GND: C1.2 C2.2 C3.2 C4.2 C5.2 C6.2 C7.2 C8.2 C9.1 C10.2 C11.2 C12.2 C13.1 C14.1 C15.2 C16.2 C17.2 C18.2 C19.2 C20.2 C21.1 C22.1 C23.2 C24.2 C25.2 C26.2 C31.2 C32.2 C33.2 C34.2 C35.1 C42.1 C44.2 C45.2 FB2.1 GND.1 P1.3 P1.5 P1.9 R1.1 R6.2 R7.2 R12.1 R13.1 R14.1 R15.1 R16.1 R17.1 R18.1 U1.32 U1.49 U2.8 U2.9 U4.6 U4.7 U5.2 U5.3 U5.5 U6.3 U6.13 U7.3 U7.11 X1.2 | length 38.5
  Top Layer w0.203: P1.3 10.414,7.575 ; FB2.1 11.168,17.018 11.807,17.657 ; v1(10.414,5.588) 10.414,7.575 ; P1.5 10.414,7.575 ; v1(11.811,18.288) 11.807,18.284 11.807,17.657 ; C17.2 C18.2 11.807,17.657 ; P1.9 14.687,7.575 v1(14.732,7.62) ; v1(14.732,37.592) C35.1 ; C8.2 16.268,26.793 16.268,25.277 C7.2 ; v1(16.51,35.433) 16.514,35.429 U6.3 ; R1.1 18.415,13.164 18.415,12.946 18.534,12.827 v1(18.542,12.827) ; C20.2 C19.2 ; v1(19.304,23.876) 19.262,23.834 U1.32 19.262,20.653 U1.49 ; C16.2 C15.2 21.836,11.438 v1(21.844,11.43) ; v1(24.765,29.21) 25.146,29.21 C10.2 ; X1.2 C9.1
  Bottom Layer w0.203: U7.11 U7.3 ; U5.5 16.129,19.23 16.502,19.603 C34.2 C33.2 ; C25.2 18.548,14.603 21.277,14.603 U2.8 U2.9 ; C31.2 C32.2 ; U4.7 C32.2 ; U4.6 21.336,18.915 C32.2
  other v2: 18.161,34.429 18.161,35.179 18.161,35.929
  other v3: 20,5 32,30
GND_RF: C27.1 C28.1 R6.1 U1.22 U3.2 U3.3 U3.4 X2.1 X2.3 X2.5 X2.7 | length 7.5
  Top Layer w0.203: U1.22 24.955,21.653 25.411,22.109 C27.1
  Top Layer w0.254: U3.2 U3.3 39.131,15.89 38.481,15.24
GYRO_CS: U1.12 U4.12 | length 16
  Top Layer w0.203: U1.12 22.792,16.528 22.81,16.51 v1(24.257,16.51)
  Layer 1 w0.203: v1(23.933,25.781) 24.257,25.457 v1(24.257,16.51)
  Bottom Layer w0.203: U4.12 20.836,22.614 23.876,25.654 23.876,25.671 23.933,25.728 v1(23.933,25.781)
JTAG_JTCK: P1.4 U1.41 | length 12.6
  Top Layer w0.203: P1.4 9.779,14.855 13.359,18.436 13.423,18.436 15.64,20.653 U1.41
JTAG_JTDI: P1.8 U1.42 | length 11.8
  Top Layer w0.203: P1.8 v1(12.319,14.351) ; v1(13.525,18.034) 13.589,18.034 15.708,20.153 U1.42
  Layer 1 w0.203: v1(13.525,18.034) 13.525,14.414 v1(13.589,14.351)
  Layer 2 w0.203: v1(12.319,14.351) v1(13.589,14.351)
JTAG_JTDO: P1.6 U1.43 | length 12.7
  Top Layer w0.203: P1.6 v1(11.049,13.716) ; v1(14.184,17.78) 16.057,19.653 U1.43
  Layer 1 w0.203: v1(14.184,17.78) 14.224,17.74 v1(14.224,13.716)
  Layer 2 w0.203: v1(11.049,13.716) v1(14.224,13.716)
JTAG_JTMS: P1.2 U1.39 | length 18.4
  Top Layer w0.203: P1.2 v1(8.509,13.208) ; v1(14.952,21.59) 14.986,21.59 15.017,21.621 16.605,21.621 U1.39
  Layer 1 w0.203: v1(14.952,21.59) 14.986,21.59 15,21.576 v1(15,13.208)
  Layer 2 w0.203: v1(8.509,13.208) v1(15,13.208)
JTAG_JTRST: P1.7 U1.44 | length 19.6
  Top Layer w0.203: P1.7 12.319,5.969 12.954,5.334 v1(15.621,5.334) ; v1(15.621,18.161) 15.621,18.415 16.311,19.105 16.589,19.105 U1.44
  Layer 1 w0.203: v1(15.621,5.334) v1(15.621,18.161)
NetC4_1: C4.1 L1.1 U1.33 | length 9.1
  Top Layer w0.203: U1.33 18.762,23.902 19.939,25.079 19.939,28.786 L1.1 20.363,31.719 C4.1
NetC9_2: C9.2 U1.25 X1.3 | length 12.4
  Top Layer w0.203: U1.25 23.991,23.278 24.335,23.622 24.335,31.45 25.258,32.373 C9.2
NetC10_1: C10.1 U1.24 X1.1 | length 10.6
  Top Layer w0.203: U1.24 24.304,22.653 24.638,22.987 24.638,28.321 24.892,28.575 25.916,28.575 26.035,28.694 26.035,28.702 26.573,29.24 C10.1 26.573,30.758 X1.1
NetC27_2: C27.2 L2.1 U1.21 | length 4.4
  Top Layer w0.203: U1.21 23.389,21.151 26.104,21.151 C27.2 L2.1
NetC28_2: C28.2 L2.2 X2.8 | length 2.4
  Top Layer w0.203: L2.2 C28.2 X2.8
NetC43_1: C43.1 J1.Shell R19.1 | length 22.4
  Top Layer w0.203: J1.Shell@7.05,16.249 7.05,14.286 v1(7.112,14.224) ; J1.Shell@7.05,23.629 7.05,24.957 v1@7.239,25.146 ; v1(7.112,25.273) 7.366,25.273 8.128,26.035 10.934,26.035 R19.1
  Layer 1 w0.203: v1(7.112,14.224) v1(7.112,25.273)
  Bottom Layer w0.254: J1.Shell@7.05,16.114 7.05,14.326 7.112,14.264 v1(7.112,14.224) ; J1.Shell@7.05,23.764 7.05,25.171 7.112,25.233 v1(7.112,25.273)
NetD1_1: D1.1 J1.A6 R20.2 | length 3.1
  Top Layer w0.203: J1.A6 8.505,19.689 8.89,19.304 R20.2
NetD2_1: D2.1 J1.A7 R21.2 | length 3.2
  Top Layer w0.203: J1.A7 8.251,20.189 8.509,20.447 8.89,20.828 R21.2
NetL1_2: L1.2 U1.31 | length 7.2
  Top Layer w0.203: U1.31 19.762,24.334 22.733,27.305 L1.2
NetL3_1: L3.1 U6.2 | length 2.6
  Top Layer w0.254: L3.1 15.453,35.631 15.751,35.929 U6.2
NetR1_2: R1.2 U1.4 | length 2.6
  Top Layer w0.203: R1.2 18.288,14.986 18.796,15.494 18.796,16.494 U1.4
NetR7_1: R7.1 U2.11 | length 4.7
  Bottom Layer w0.203: R7.1@18.542,17.538 18.415,17.411 18.415,16.891 19.177,16.129 21.458,16.129 21.848,15.739 U2.11 U2.11@21.81,15.712
NetR8_1: R8.1 R12.2 U6.8 | length 4.7
  Top Layer w0.203: U6.8 19.134,34.406 v1(19.84,34.406) 20.546,34.406 R12.2 R12.2@20.574,34.403 ; v1(19.812,36.449) 20.401,37.038 20.401,37.121 R8.1
  Bottom Layer w0.203: v1(19.812,36.449) 19.812,34.434 v1(19.84,34.406)
NetR9_1: R9.1 R13.2 U6.9 | length 5.4
  Top Layer w0.203: U6.9 v1(21.471,34.929) 21.471,34.497 R13.2 ; v1(21.463,36.576) 21.501,36.614 21.501,37.205 R9.1
  Bottom Layer w0.203: v1(21.463,36.576) 21.463,34.937 v1(21.471,34.929)
NetR10_1: R10.1 R14.2 U6.10 | length 6.4
  Top Layer w0.203: U6.10 v1(22.475,35.429) 22.606,35.298 R14.2 ; v1(22.479,36.576) 22.517,36.614 22.517,37.205 R10.1
  Bottom Layer w0.203: v1(22.475,35.429) 22.479,35.433 v1(22.479,36.576)
NetR11_1: R11.1 R15.2 U6.11 | length 7.5
  Top Layer w0.203: U6.11 23.503,35.929 23.622,35.81 ; R15.2 23.622,35.81 ; R11.1 23.622,35.81
NetR16_2: R16.2 U7.2 | length 1.8
  Bottom Layer w0.203: U7.2 9.9,19.986 9.9,20.441 10.086,20.627 10.089,20.627 10.27,20.807 10.27,21.05 10.568,21.348 R16.2
NetR17_2: R17.2 U7.4 | length 2.1
  Bottom Layer w0.203: U7.4 10.674,19.986 10.674,20.441 10.907,20.674 11.18,20.674 11.413,20.907 11.413,21.05 11.711,21.348 R17.2
NetR18_2: R18.2 U7.9 | length 18.5
  Layer 1 w0.203: v1(9.906,16.002) 9.906,21.53 10.308,21.932 10.308,22.264 9.906,22.666 v1(9.906,23.876)
  Bottom Layer w0.203: U7.9 9.887,16.021 v1(9.906,16.002) ; v1(9.906,23.876) 17.923,23.876 R18.2
NetU1_28: U1.28 U6.7 | length 21.3
  Top Layer w0.203: v1(15.24,29.337) 18.161,29.337 19.05,30.226 19.05,33.906 19.073,33.929 U6.7 ; U1.28 21.262,24.056 v1(22.098,24.892)
  Layer 1 w0.203: v1(15.24,24.892) v1(15.24,29.337)
  Layer 2 w0.203: v1(15.24,24.892) 15.388,25.04 21.95,25.04 v1(22.098,24.892)
NetU1_29: U1.29 U6.4 | length 17.2
  Top Layer w0.203: v1(16.51,34.925) 17.207,34.925 U6.4 ; U1.29 20.762,24.196 20.818,24.252 20.828,24.262 v1(20.828,24.638)
  Layer 1 w0.203: v1(16.51,24.278) v1(16.51,34.925)
  Layer 2 w0.203: v1(16.51,24.278) 20.468,24.278 v1(20.828,24.638)
NetU3_1: U3.1 X2.4 | length 4.8
  Top Layer w0.254: X2.4 37.807,21.209 U3.1
RESET: P1.10 R4.2 U1.7 | length 16
  Top Layer w0.203: v1(11.684,15.24) 12.573,15.24 12.954,14.859 12.954,14.034 13.589,13.399 P1.10 ; R4.2 19.812,14.986 v1(20.037,15.211) 20.262,15.436 U1.7
  Layer 2 w0.203: v1(11.684,15.24) 11.713,15.211 v1(20.037,15.211)
SPI1_MISO: U1.15 U2.1 U4.1 | length 12.4
  Top Layer w0.203: U1.15 23.512,18.153 23.66,18.005 23.746,18.005 24.765,16.985 24.765,15.711 v1(24.81,15.666)
  Bottom Layer w0.203: U4.1 23.357,21.68 24.81,20.227 v1(24.81,15.666) 24.728,15.584 U2.1
SPI1_MOSI: U1.16 U2.2 U4.14 | length 16.6
  Top Layer w0.203: U1.16 23.435,18.605 23.646,18.605 25.535,16.715 v1(25.535,15.175)